# Altium PCB PCB_Rev1.1.PcbDoc (part 1 of 4)
Units mm, origin at the board's own origin, x right, y up, seen from the top; angles counter-clockwise.
Board outline 81.62 x 96.13 mm, 4 copper layers (Top Layer, GND, PWR, Bottom Layer), stack 1.49 mm thick; 185 components, 276 nets, 1052 pads, 353 vias.
Unrouted connection lines stored in the file: 133.
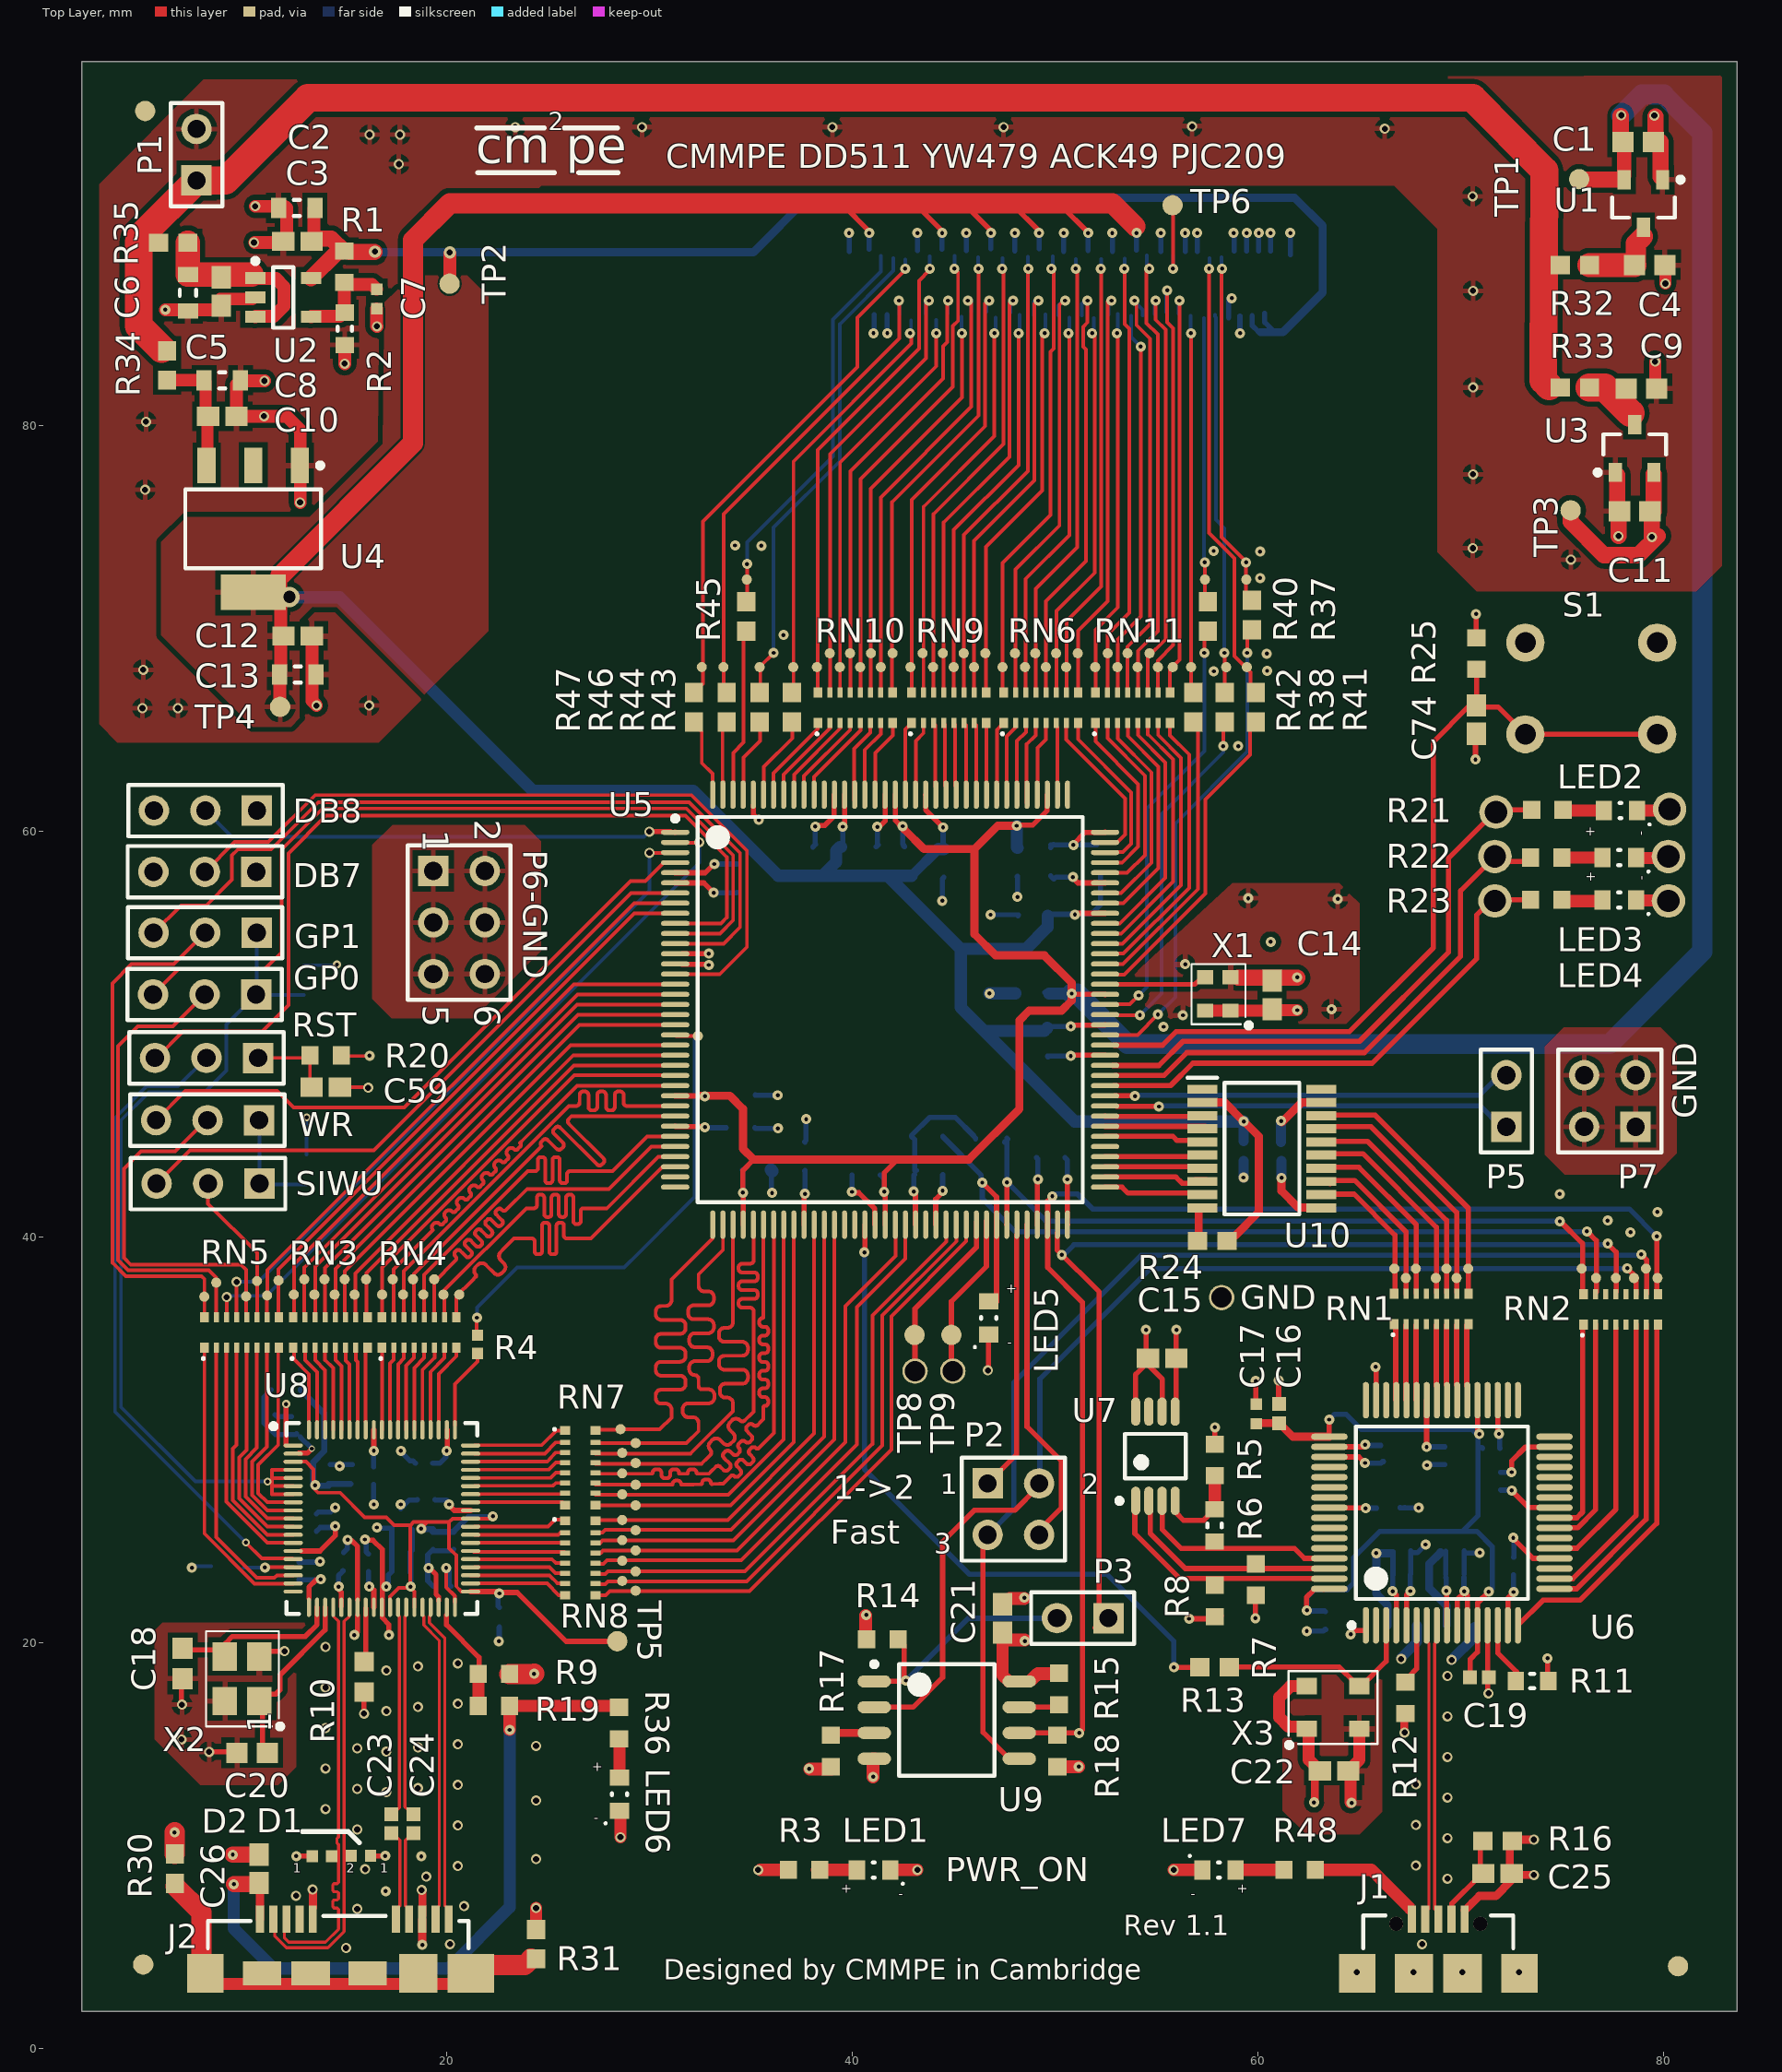
[diagram p0: Top Layer view]
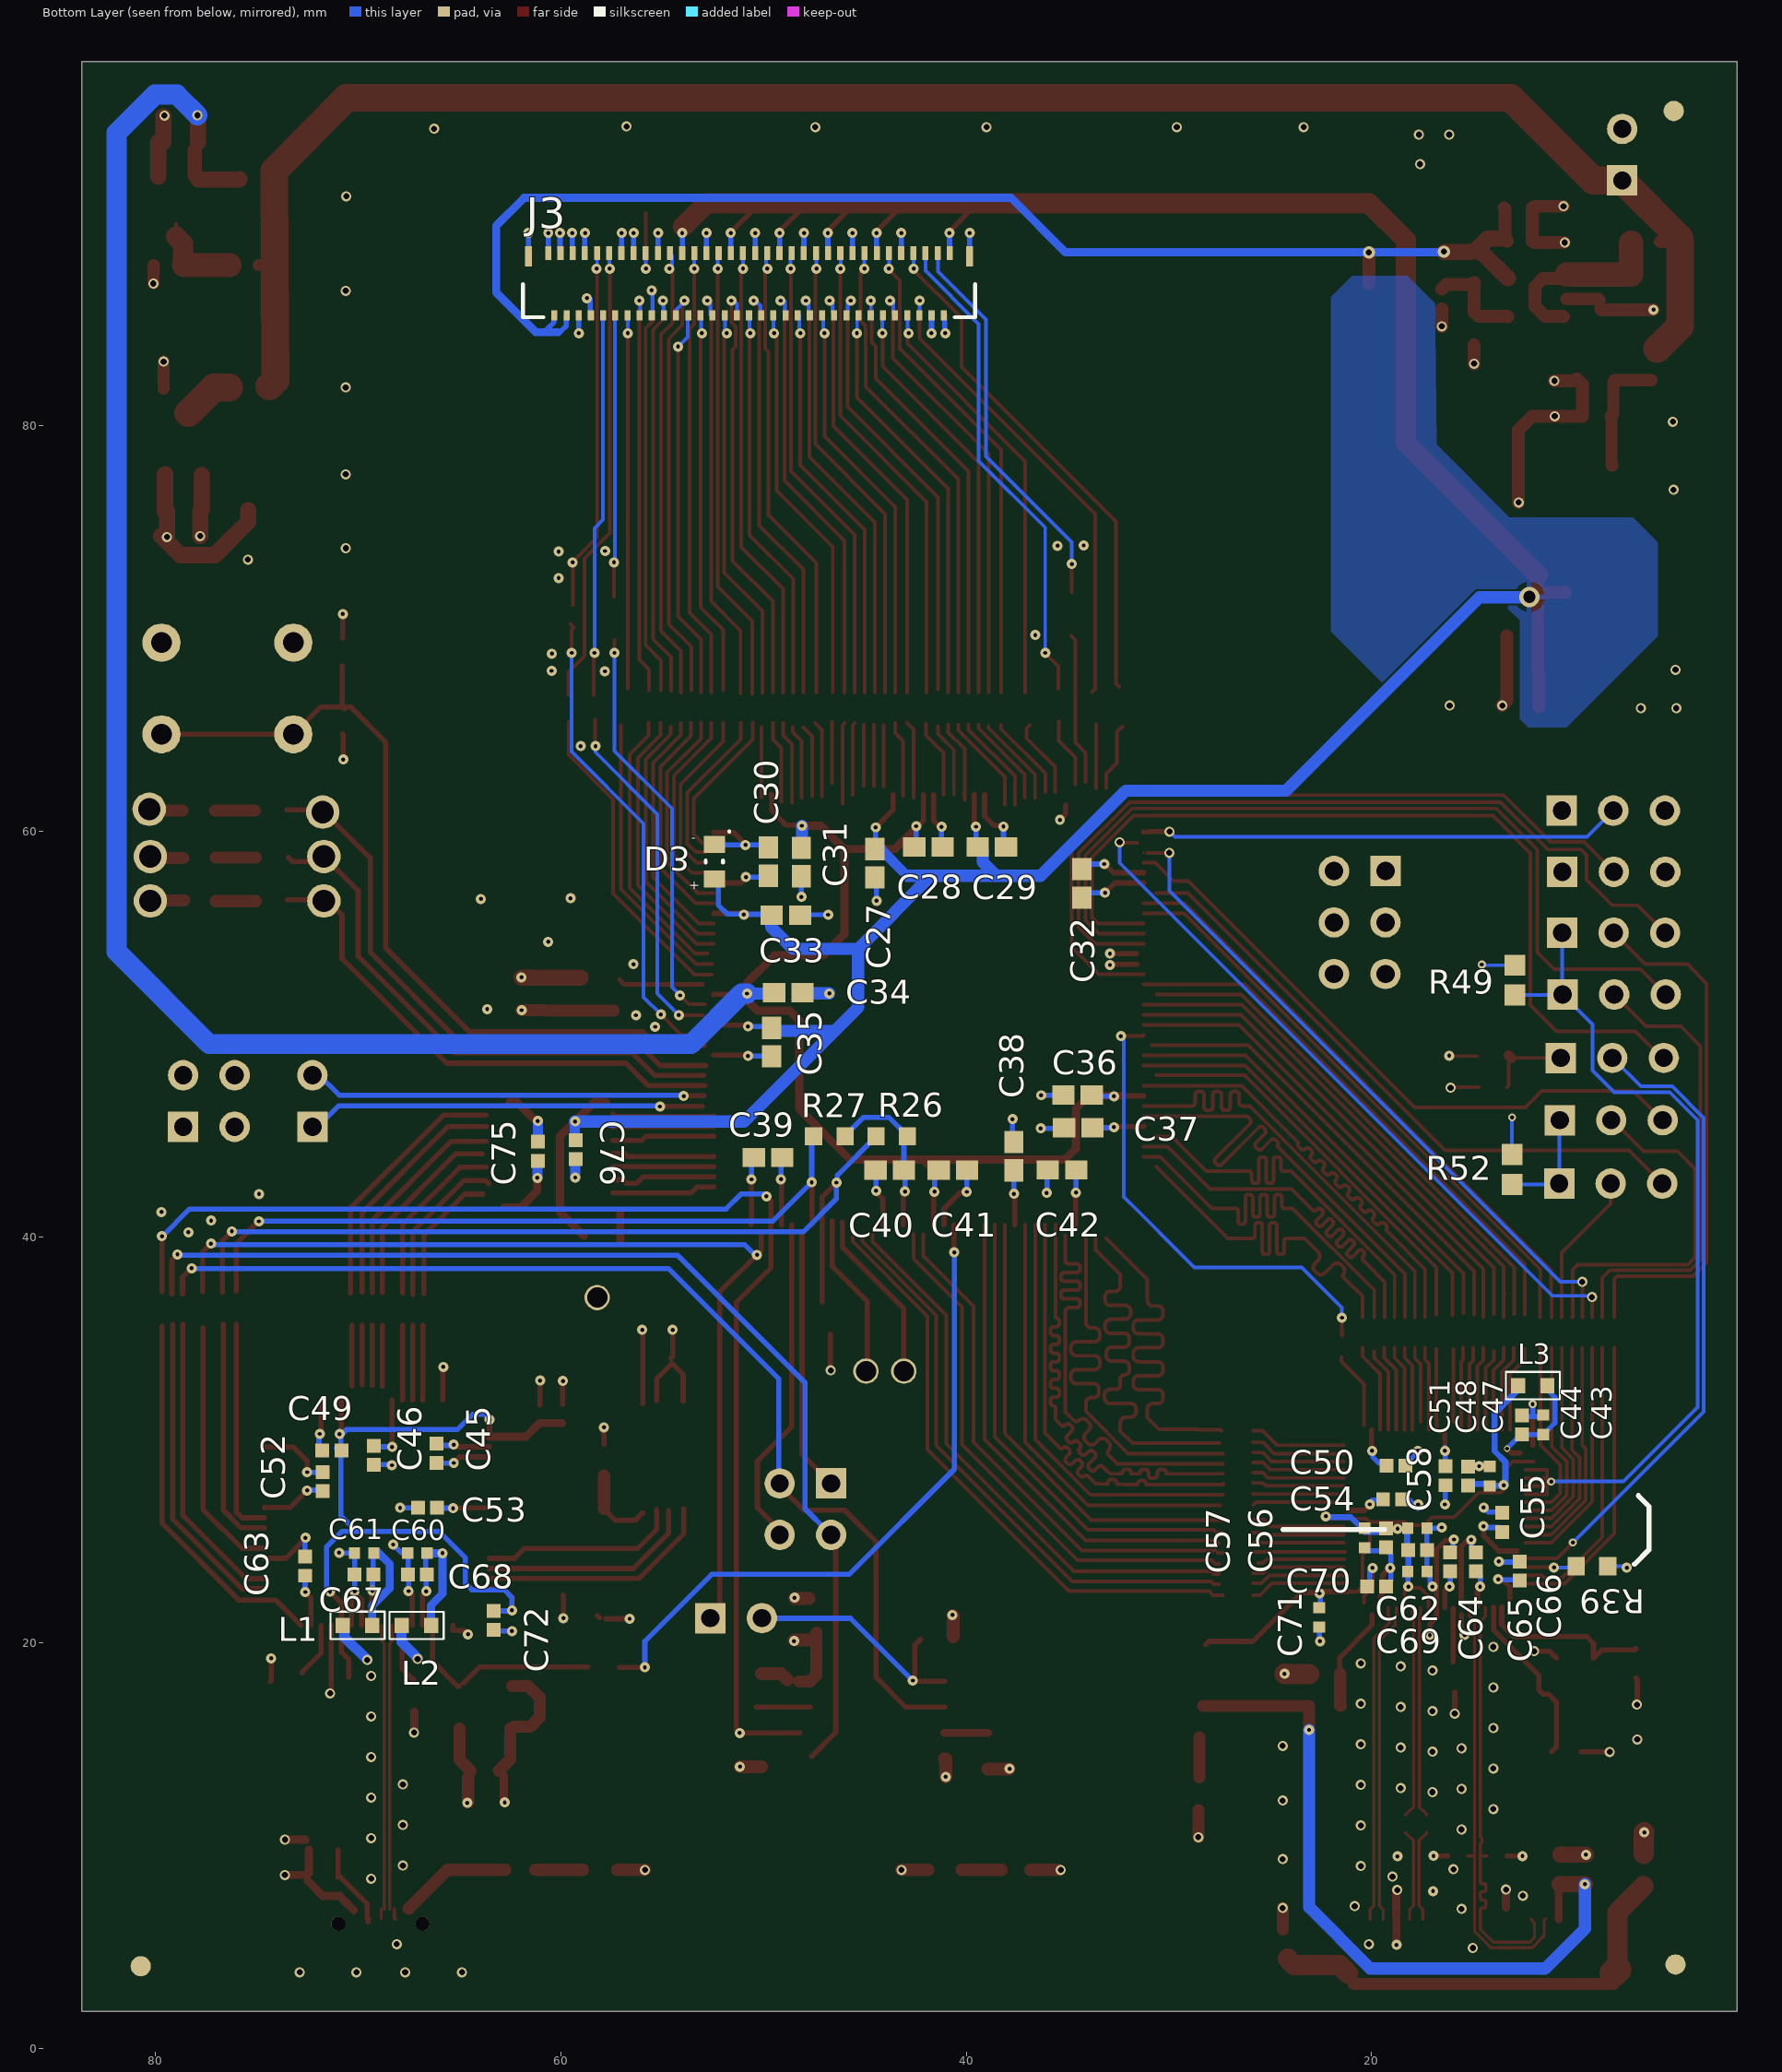
[diagram p1: Bottom Layer view, seen from below]
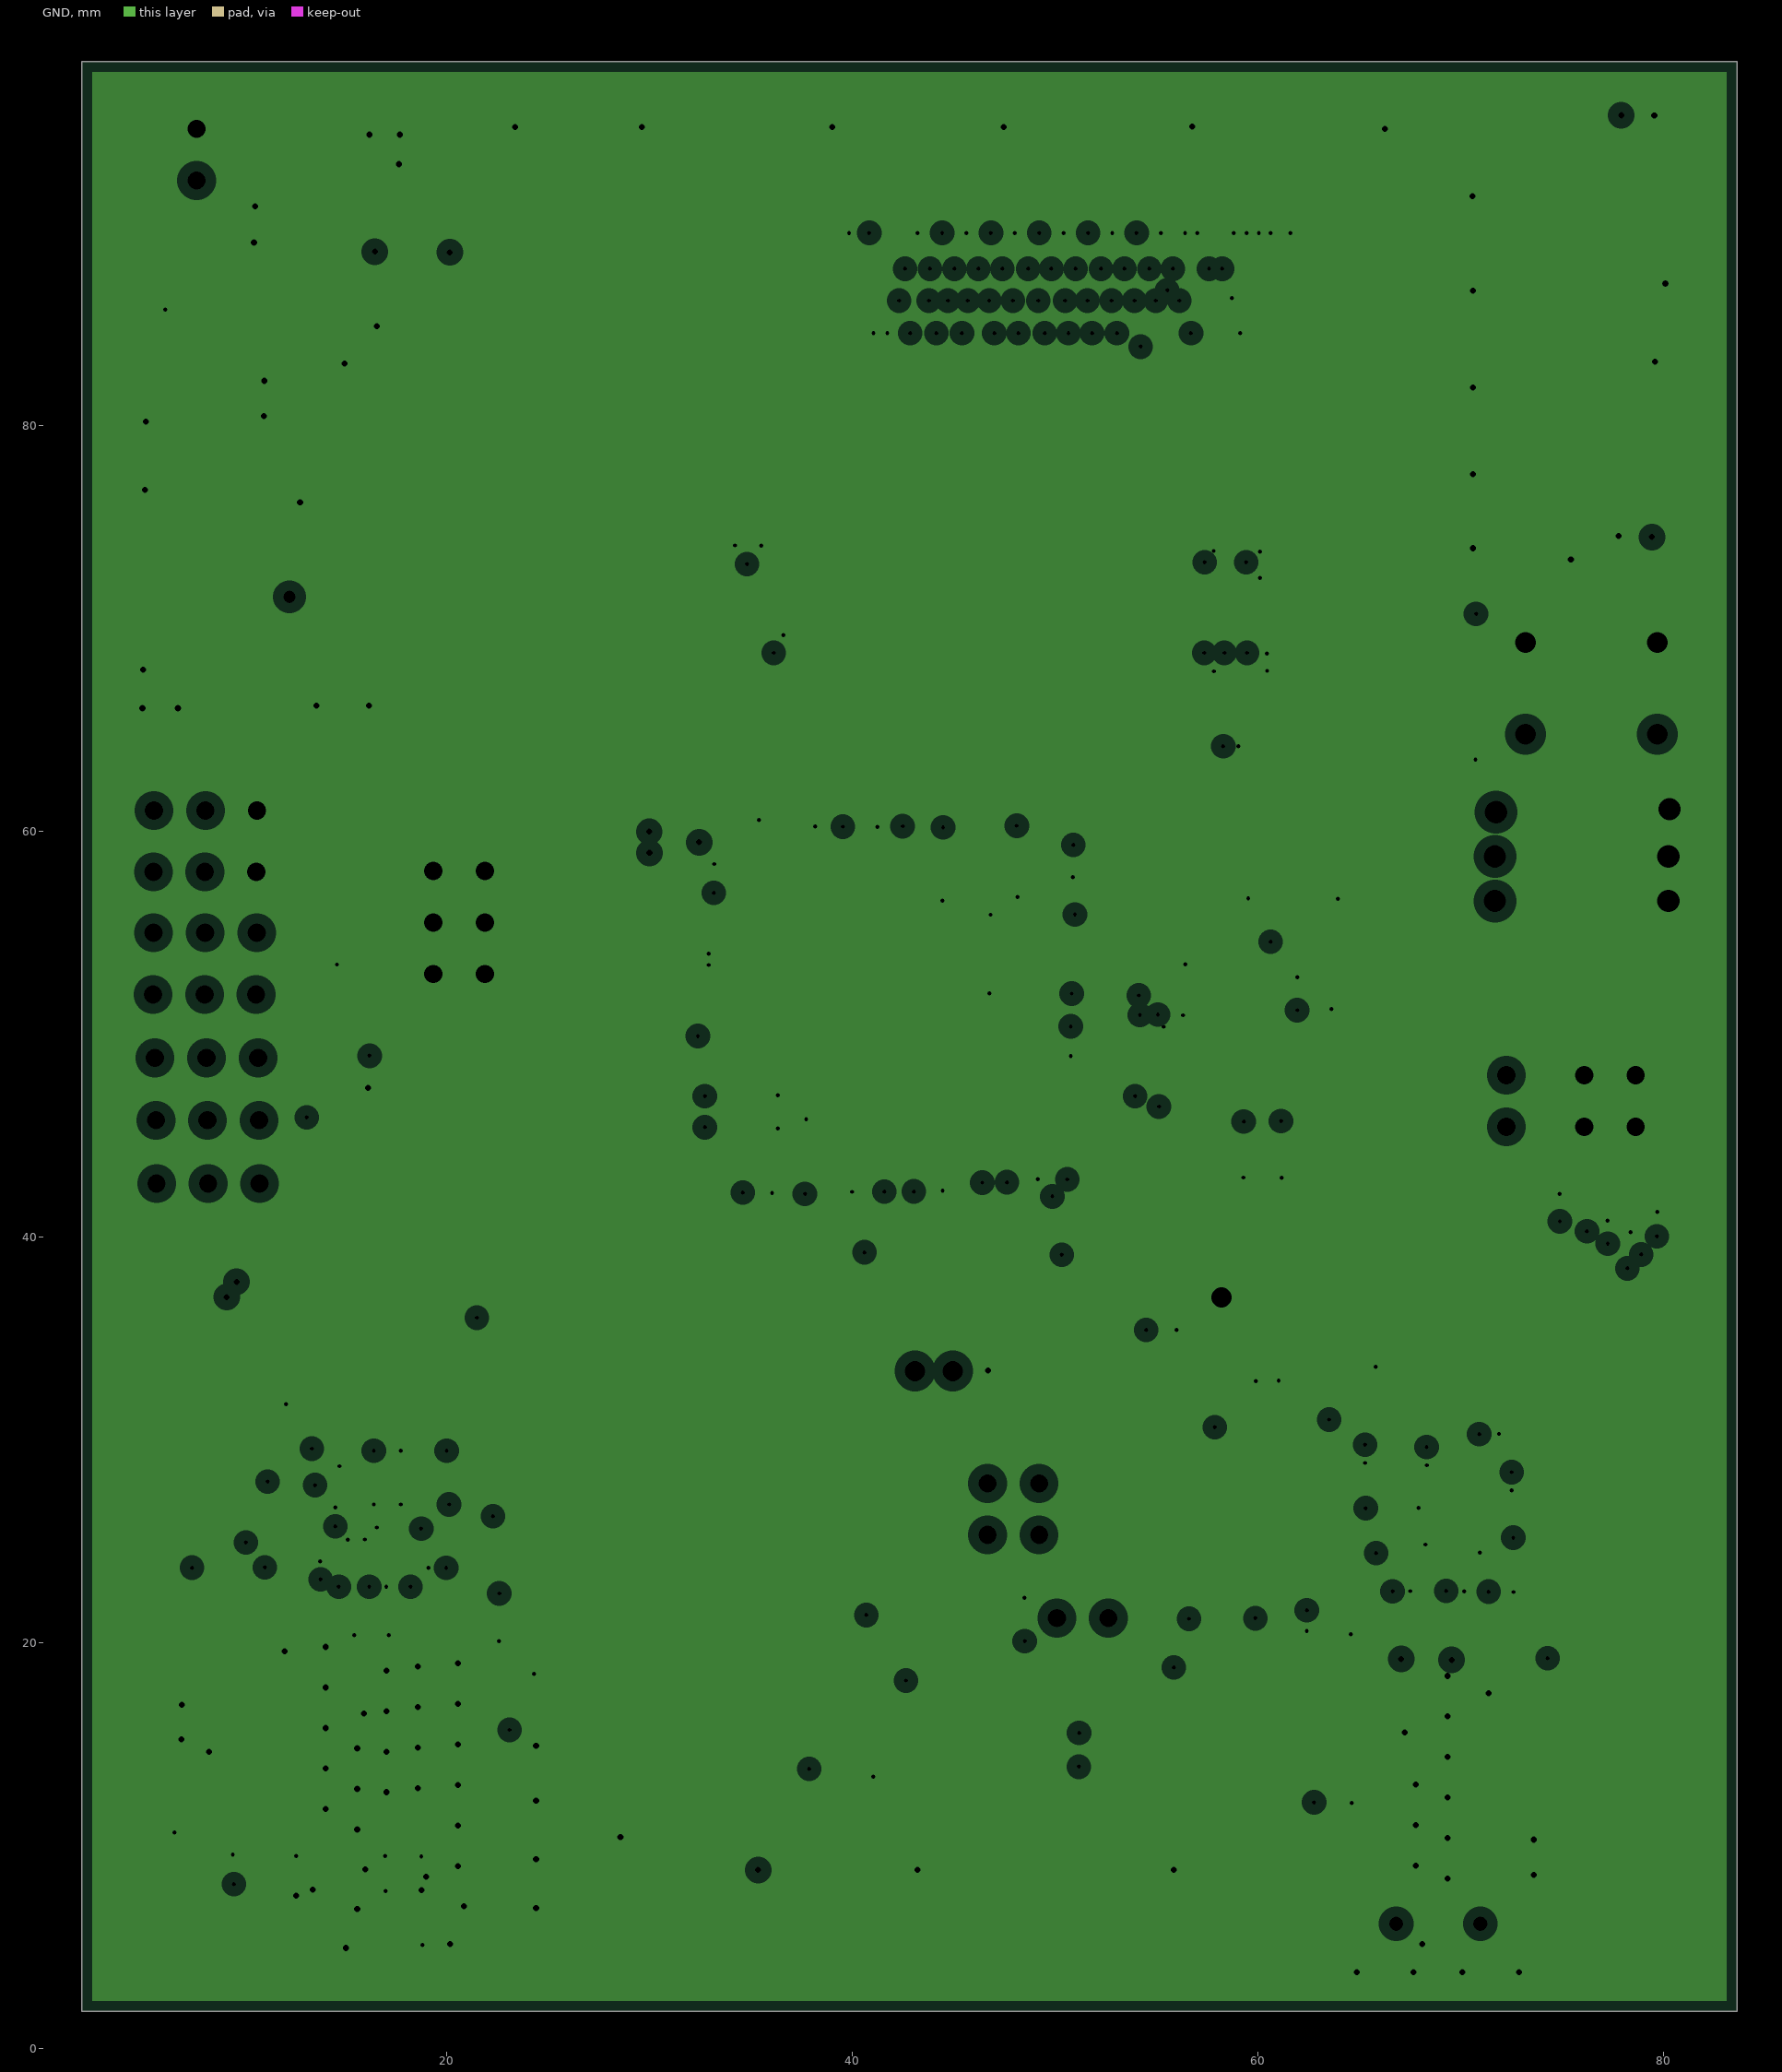
[diagram p2: GND, clearances drawn from the general rule]
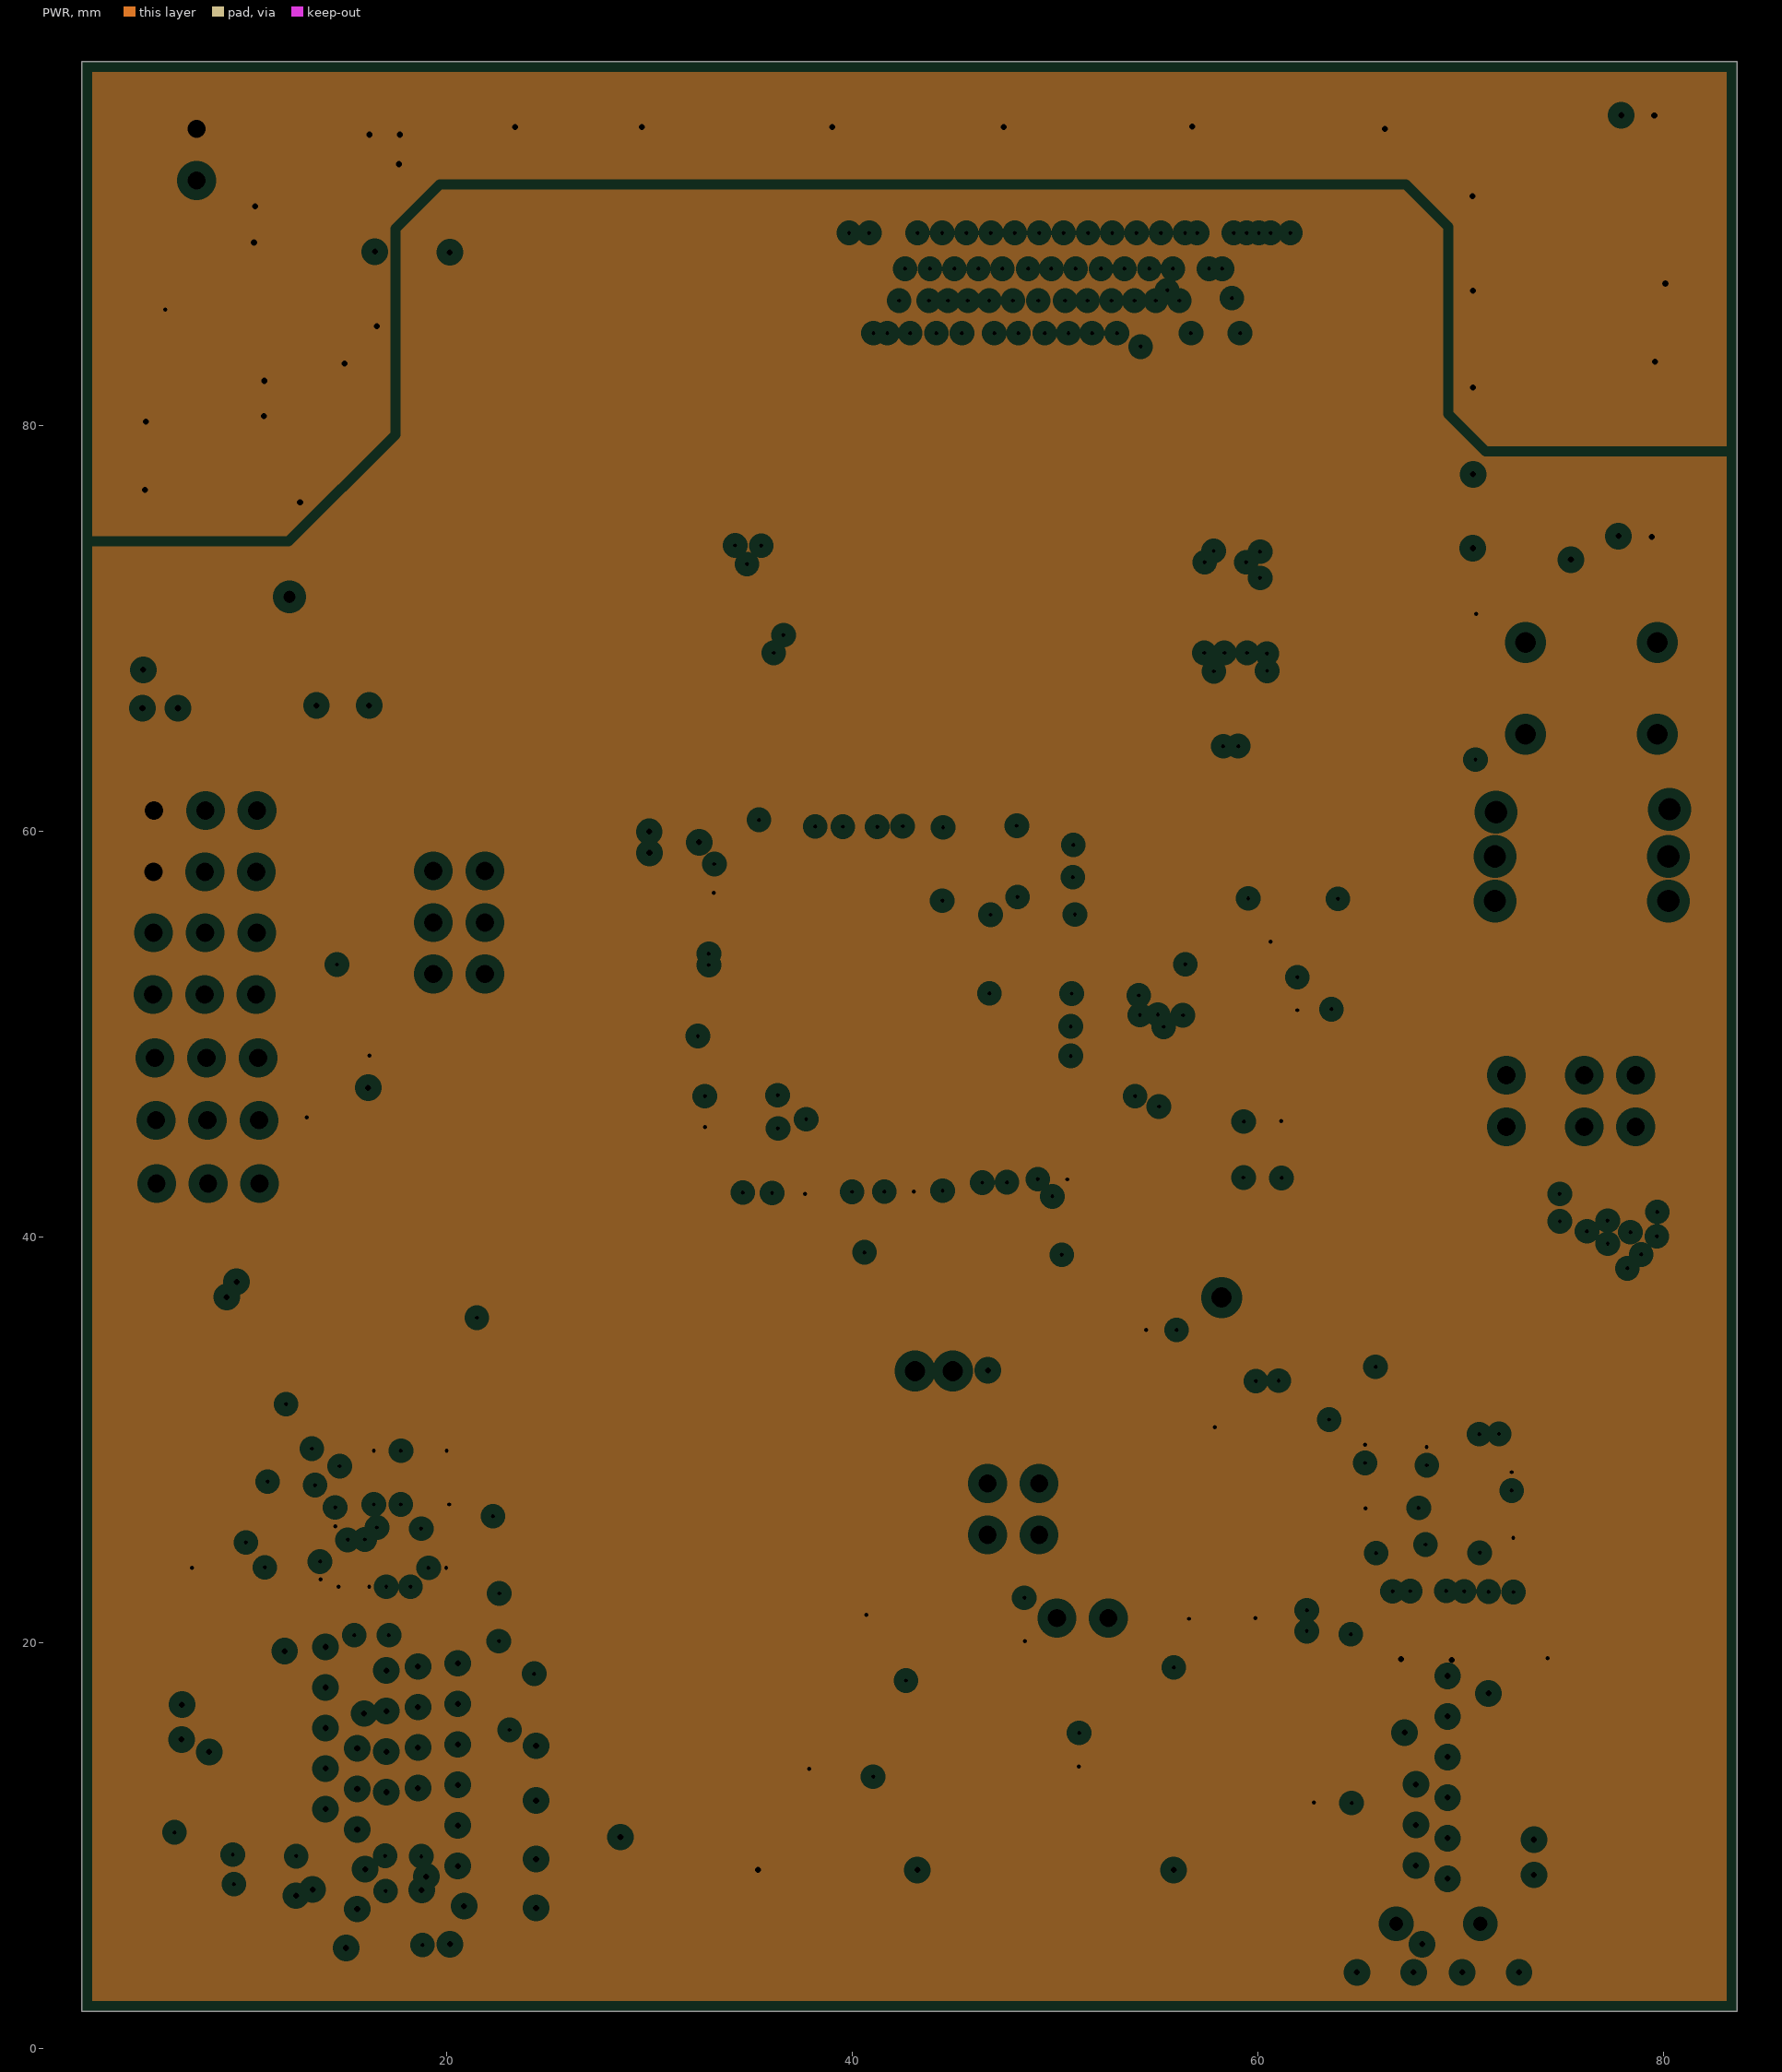
[diagram p3: PWR, clearances drawn from the general rule]

## Layer stack, top to bottom
Top Solder: solder mask 0.0102, Solder Resist, Dk 3.5
Top Layer: signal copper 0.035
Dielectric 1-2: prepreg 0.11, PP-015, Dk 4.29
GND: plane copper 0.035, net GND
Dielectric 2-3: dielectric 1.13, FR-4, Dk 3.96
PWR: plane copper 0.035, net (Multiple Nets)
Dielectric 3-4: prepreg 0.11, PP-015, Dk 4.29
Bottom Layer: signal copper 0.035
Bottom Solder: solder mask 0.0102, Solder Resist, Dk 3.5

## Board outline
1.994,1.817 83.612,1.817 83.612,97.944 1.994,97.944

## Design rules (kind name [scope] priority, off if disabled: settings)
Clearance PolygonAll [InNamedPolygon('Top Layer-GND') Or  InNamedPolygon('Top Layer-GND 4') Or  InNamedPolygon('Top Layer-GND 3') Or  InNamedPolygon('Top Layer-GND 2')] p1: gap=0.254 ignorepadtopadclearanceinfootprint=FALSE
Clearance [All] p2: gap=0.102 ignorepadtopadclearanceinfootprint=TRUE
ComponentClearance [All] p1: gap=0.025 collisioncheckmode=3 verticalgap=0.254 showdistances=FALSE
DiffPairsRouting DiffPair_Diff90DiffPairsRouting [InDifferentialPairClass('Diff90')] p1: maxlimit=0.127 minlimit=0.127 mostfreqgap=0.127 toplayer_minwidth=0.15 toplayer_maxwidth=0.15 toplayer_prefwidth=0.15 bottomlayer_minwidth=0.15 bottomlayer_maxwidth=0.15 bottomlayer_prefwidth=0.15 maxuncoupledlength=12.7
HoleSize [All] p1: absolutevalues=TRUE maxlimit=2.54 minlimit=0.2 maxpercent=80.000 minpercent=20.000
HoleToHoleClearance [All] p1: gap=0.1 allowstackedmicrovias=TRUE
MatchedLengths "Schematic Matched Net Lengths_1" [InNetClass('FT601FIFO')] p1: tolerance=24.5 checknetsindiffpair=FALSE checkdiffpairvsdiffpair=TRUE checkxsignals=TRUE checkothers=TRUE
MatchedLengths "Schematic Matched Net Lengths_42" [InNet('DATA16')] p2: tolerance=5 checknetsindiffpair=FALSE checkdiffpairvsdiffpair=TRUE checkxsignals=TRUE checkothers=TRUE
MatchedLengths "Schematic Matched Net Lengths_41" [InNet('DATA10')] p3: tolerance=5 checknetsindiffpair=FALSE checkdiffpairvsdiffpair=TRUE checkxsignals=TRUE checkothers=TRUE
MatchedLengths "Schematic Matched Net Lengths_40" [InNet('DATA11')] p4: tolerance=5 checknetsindiffpair=FALSE checkdiffpairvsdiffpair=TRUE checkxsignals=TRUE checkothers=TRUE
MatchedLengths "Schematic Matched Net Lengths_39" [InNet('DATA12')] p5: tolerance=5 checknetsindiffpair=FALSE checkdiffpairvsdiffpair=TRUE checkxsignals=TRUE checkothers=TRUE
MatchedLengths "Schematic Matched Net Lengths_38" [InNet('DATA13')] p6: tolerance=5 checknetsindiffpair=FALSE checkdiffpairvsdiffpair=TRUE checkxsignals=TRUE checkothers=TRUE
MatchedLengths "Schematic Matched Net Lengths_37" [InNet('DATA14')] p7: tolerance=5 checknetsindiffpair=FALSE checkdiffpairvsdiffpair=TRUE checkxsignals=TRUE checkothers=TRUE
MatchedLengths "Schematic Matched Net Lengths_36" [InNet('DATA15')] p8: tolerance=5 checknetsindiffpair=FALSE checkdiffpairvsdiffpair=TRUE checkxsignals=TRUE checkothers=TRUE
MatchedLengths "Schematic Matched Net Lengths_35" [InNet('DATA9')] p9: tolerance=5 checknetsindiffpair=FALSE checkdiffpairvsdiffpair=TRUE checkxsignals=TRUE checkothers=TRUE
MatchedLengths "Schematic Matched Net Lengths_24" [InNet('DATA31')] p10: tolerance=5 checknetsindiffpair=FALSE checkdiffpairvsdiffpair=TRUE checkxsignals=TRUE checkothers=TRUE
MatchedLengths "Schematic Matched Net Lengths_22" [InNet('DATA26')] p11: tolerance=5 checknetsindiffpair=FALSE checkdiffpairvsdiffpair=TRUE checkxsignals=TRUE checkothers=TRUE
MatchedLengths "Schematic Matched Net Lengths_21" [InNet('DATA17')] p12: tolerance=5 checknetsindiffpair=FALSE checkdiffpairvsdiffpair=TRUE checkxsignals=TRUE checkothers=TRUE
MatchedLengths "Schematic Matched Net Lengths_20" [InNet('SDAT')] p13: tolerance=5 checknetsindiffpair=FALSE checkdiffpairvsdiffpair=TRUE checkxsignals=TRUE checkothers=TRUE
MatchedLengths "Schematic Matched Net Lengths_19" [InNet('DATA25')] p14: tolerance=5 checknetsindiffpair=FALSE checkdiffpairvsdiffpair=TRUE checkxsignals=TRUE checkothers=TRUE
MatchedLengths DiffPair_Diff90MatchedLengths [InDifferentialPairClass('Diff90')] p15: tolerance=0.127 checknetsindiffpair=TRUE checkdiffpairvsdiffpair=FALSE checkxsignals=FALSE checkothers=FALSE
MatchedLengths DiffPair_MatchedLengths [All] p16: tolerance=1 checknetsindiffpair=TRUE checkdiffpairvsdiffpair=FALSE checkxsignals=FALSE checkothers=FALSE
MatchedLengths DiffPair_MatchedLengths_1 [InDifferentialPair ('USB_D')] p17: tolerance=1 checknetsindiffpair=TRUE checkdiffpairvsdiffpair=FALSE checkxsignals=FALSE checkothers=FALSE
MinimumSolderMaskSliver [All] p1: minsoldermaskwidth=0.1
PlaneClearance [All] p1: clearance=0.508
PlaneConnect [All] p1: planeconnectstyle=Relief reliefexpansion=0.508 reliefentries=4 reliefconductorwidth=0.254 reliefairgap=0.254
PolygonConnect [All] p1: connectstyle=Relief reliefconductorwidth=0.254 reliefentries=4 polygonreliefangle="90 Angle" airgapwidth=0.254
RoomDefinition FPGA_Power_SPI [InComponentClass('FPGA_Power_SPI')] p1: confinementstyle=ConfineIn formatcopy=TRUE lockcomponents=FALSE outline 0,0 50.8,0 50.8,25.4 0,25.4
RoomDefinition USB_SPI [InComponentClass('USB_SPI')] p2: confinementstyle=ConfineIn formatcopy=TRUE lockcomponents=FALSE outline 0,0 50.8,0 50.8,25.4 0,25.4
RoomDefinition FT601 [InComponentClass('FT601')] p3: confinementstyle=ConfineIn formatcopy=TRUE lockcomponents=FALSE outline 0,0 50.8,0 50.8,25.4 0,25.4
RoomDefinition FPGA_SLM [InComponentClass('FPGA_SLM')] p4: confinementstyle=ConfineIn formatcopy=TRUE lockcomponents=FALSE outline 0,0 50.8,0 50.8,25.4 0,25.4
RoutingVias [All] p1: holewidth=0.711 width=1.27 viastyle="Through Hole" minholewidth=0.2 minwidth=0.3 maxholewidth=0.711 maxwidth=1.27
SilkToSilkClearance [All] p1: silktosilkclearance=0.1
SilkToSolderMaskClearance [IsPad] p1: minsilkscreentomaskgap=0.1 clearancetoexposedcopper=TRUE
SolderMaskExpansion [All] p1: expansion=0.102
UnRoutedNet [All] p1: checkbadconnections=TRUE
Width [All] p1: maxlimit=1.37 minlimit=0.014 preferedwidth=0.254
20 further rules are at their usual default settings.

## Classes and differential pairs
net class FT601FIFO: FIFO_CLK FIFO_D0 FIFO_D1 FIFO_D2 FIFO_D3 FIFO_D4 FIFO_D5 FIFO_D6 FIFO_D7 FIFO_D8 FIFO_D9 FIFO_D10 FIFO_D11 FIFO_D12 FIFO_D13 FIFO_D14 FIFO_D15 FIFO_D16 FIFO_D17 FIFO_D18 FIFO_D19 FIFO_D20 FIFO_D21 FIFO_D22 FIFO_D23 FIFO_D24 FIFO_D25 FIFO_D26 FIFO_D27 FIFO_D28 FIFO_D29 FIFO_D30 FIFO_D31 FT_OE FT_RD FT_RXF FT_SIWU FT_TXE FT_WR
net class SLM: DATA0 DATA1 DATA2 DATA3 DATA4 DATA5 DATA6 DATA7 DATA8 DATA9 DATA10 DATA11 DATA12 DATA13 DATA14 DATA15 DATA16 DATA17 DATA18 DATA19 DATA20 DATA21 DATA22 DATA23 DATA24 DATA25 DATA26 DATA27 DATA28 DATA29 DATA30 DATA31 INVERT NetJ3_17 R\E\S\E\T\ SCK SDAT SEN SLM_CLK SOUT SYNC UPDATE VALID
differential pair class Diff90: D ROD TD TD1 USB_D
component class USB_SPI: C15 C16 C17 C19 C22 C25 C45 C46 C49 C52 C53 C60 C61 C63 C67 C68 C72 C75 C76 J1 L1 L2 LED7 R5 R6 R7 R8 R11 R12 R13 R16 R24 R48 RN1 RN2 U6 U7 U10 X3
component class FT601: * *1 C18 C20 C23 C24 C26 C43 C44 C47 C48 C50 C51 C54 C55 C56 C57 C58 C59 C62 C64 C65 C66 C69 C70 C71 D1 D2 DB7 DB8 GP0 GP1 J2 L3 LED6 R4 R9 R10 R19 R20 R30 R31 R36 R39 R49 R52 RN3 RN4 RN5 RN7 RN8 RST SIWU TP5 U8 WR X2
component class FPGA_SLM: C14 C74 J3 P5 R25 R37 R38 R40 R41 R42 R43 R44 R45 R46 R47 RN6 RN9 RN10 RN11 S1 tp6 tp7 U5 X1
component class FPGA_Power_SPI: C1 C2 C3 C4 C5 C6 C7 C8 C9 C10 C11 C12 C13 C21 C27 C28 C29 C30 C31 C32 C33 C34 C35 C36 C37 C38 C39 C40 C41 C42 D3 LED1 LED2 LED3 LED4 LED5 P1 P2 P3 P6-GND P7 R1 R2 R3 R14 R15 R17 R18 R21 R22 R23 R26 R27 R32 R33 R34 R35 TP1 TP2 TP3 TP4 TP8 TP9 U1 U2 U3 U4 U9
differential pair D: +D_P -D_N
differential pair TD1: +TD1_P -TD1_N
differential pair USB_D: +USB_D_P -USB_D_N
differential pair TD: +TD_P -TD_N
differential pair ROD: +ROD_P -ROD_N

## Components (designator, comment, footprint, x,y, rotation, side; value= is the part's Value field where it differs from the comment)
C1 "C0603C475K9PAC7411" Cap_4.7uF 78.738,93.98 r0 top value=4.7uF
C2 "C1608X5R0J106K080AE" Cap_10uF 12.586,90.736 r0 top value=10uF
C3 "AC0603KRX7R9BB104" Cap_0.1uF 12.623,89.085 r0 top value=0.1uF
C4 "C0603C475K9PAC7411" Cap_4.7uF 79.321,87.92 r0 top value=4.7uF
C5 "AC0603KRX7R9BB104" Cap_0.1uF 8.868,86.61 r90 top value=0.1uF
C6 "C1608X5R0J106K080AE" Cap_10uF 7.218,86.549 r90 top value=10uF
C7 "C0402S471K3RACAUTO" CAP_470pF 16.536,86.242 r90 top value=470pF
C8 "C1608X5R0J106K080AE" Cap_10uF 8.917,82.236 r180 top value=10uF
C9 "C0603C475K9PAC7411" Cap_4.7uF 78.904,81.827 r0 top value=4.7uF
C10 "AC0603KRX7R9BB104" Cap_0.1uF 8.917,80.458 r180 top value=0.1uF
C11 "C0603C475K9PAC7411" Cap_4.7uF 78.578,75.784 r180 top value=4.7uF
C12 "AC0603KRX7R9BB104" Cap_0.1uF 12.635,69.625 r180 top value=0.1uF
C13 "C1608X5R0J106K080AE" Cap_10uF 12.646,67.72 r180 top value=10uF
C14 "AC0603KRX7R9BB104" Cap_0.1uF 60.695,51.928 r270 top value=0.1uF
C15 "AC0603KRX7R9BB104" Cap_0.1uF 55.27,34.014 r180 top value=0.1uF
C16 "CC0402KPX5R6BB104" CAP_0.1UF_0402 61.036,31.282 r270 top value="0.1 uF"
C17 "C1005X5R0J475K050BC" CAP_4.7uF_0402 59.908,31.267 r270 top value=4.7uF
C18 "C0603C180K5RACAUTO" CAP_18pF_0603 6.963,18.97 r90 top value="18 pF"
C19 "CC0402KPX5R6BB104" CAP_0.1UF_0402 70.92,18.285 r180 top value="0.1 uF"
C20 "C0603C180K5RACAUTO" CAP_18pF_0603 10.394,14.564 r0 top value="18 pF"
C21 "AC0603KRX7R9BB104" Cap_0.1uF 47.397,21.181 r270 top value=0.1uF
C22 "AC0603KRX7R9BB104" Cap_0.1uF 63.748,13.67 r180 top value=0.1uF
C23 "CC0402KPX5R6BB104" CAP_0.1UF_0402 17.26,11.057 r90 top value="0.1 uF"
C24 "CC0402KPX5R6BB104" CAP_0.1UF_0402 18.35,11.057 r90 top value="0.1 uF"
C25 "AC0603KRX7R9BB104" Cap_0.1uF 71.811,8.606 r0 top value=0.1uF
C26 "AC0603KRX7R9BB104" Cap_0.1uF 10.736,8.836 r270 top value=0.1uF
C27 "AC0603KRX7R9BB104" Cap_0.1uF 44.506,58.426 r270 bottom value=0.1uF
C28 "AC0603KRX7R9BB104" Cap_0.1uF 41.86,59.229 r180 bottom value=0.1uF
C29 "AC0603KRX7R9BB104" Cap_0.1uF 38.741,59.222 r180 bottom value=0.1uF
C30 "AC0603KRX7R9BB104" Cap_0.1uF 49.765,58.499 r270 bottom value=0.1uF
C31 "AC0603KRX7R9BB104" Cap_0.1uF 48.133,58.483 r270 bottom value=0.1uF
C32 "AC0603KRX7R9BB104" Cap_0.1uF 34.293,57.43 r90 bottom value=0.1uF
C33 "AC0603KRX7R9BB104" Cap_0.1uF 48.891,55.863 r180 bottom value=0.1uF
C34 "AC0603KRX7R9BB104" Cap_0.1uF 48.777,52.047 r180 bottom value=0.1uF
C35 "AC0603KRX7R9BB104" Cap_0.1uF 49.606,49.603 r270 bottom value=0.1uF
C36 "AC0603KRX7R9BB104" Cap_0.1uF 34.505,46.991 r0 bottom value=0.1uF
C37 "AC0603KRX7R9BB104" Cap_0.1uF 34.475,45.38 r0 bottom value=0.1uF
C38 "AC0603KRX7R9BB104" Cap_0.1uF 37.649,43.974 r90 bottom value=0.1uF
C39 "AC0603KRX7R9BB104" Cap_0.1uF 49.77,43.911 r180 bottom value=0.1uF
C40 "AC0603KRX7R9BB104" Cap_0.1uF 43.772,43.283 r0 bottom value=0.1uF
C41 "AC0603KRX7R9BB104" Cap_0.1uF 40.658,43.283 r180 bottom value=0.1uF
C42 "AC0603KRX7R9BB104" Cap_0.1uF 35.274,43.3 r0 bottom value=0.1uF
C43 "C1005X5R0J475K050BC" CAP_4.7uF_0402 11.539,30.733 r90 bottom value=4.7uF
C44 "CC0402KPX5R6BB104" CAP_0.1UF_0402 12.588,30.731 r90 bottom value="0.1 uF"
C45 "CC0402KPX5R6BB104" CAP_0.1UF_0402 66.133,29.328 r90 bottom value="0.1 uF"
C46 "CC0402KPX5R6BB104" CAP_0.1UF_0402 69.21,29.227 r90 bottom value="0.1 uF"
C47 "C0402C682K5RECAUTO" CAP_6700pF_0402 14.176,28.197 r90 bottom value="6800 pF"
C48 "CC0402KPX5R6BB104" CAP_0.1UF_0402 15.245,28.205 r90 bottom value="0.1 uF"
C49 "CC0402KPX5R6BB104" CAP_0.1UF_0402 71.284,29.465 r180 bottom value="0.1 uF"
C50 "CC0402KPX5R6BB104" CAP_0.1UF_0402 18.81,28.716 r180 bottom value="0.1 uF"
C51 "CC0402KPX5R6BB104" CAP_0.1UF_0402 16.369,28.22 r270 bottom value="0.1 uF"
C52 "CC0402KPX5R6BB104" CAP_0.1UF_0402 71.742,27.928 r90 bottom value="0.1 uF"
C53 "CC0402KPX5R6BB104" CAP_0.1UF_0402 66.566,26.65 r180 bottom value="0.1 uF"
C54 "CC0402KPX5R6BB104" CAP_0.1UF_0402 18.971,27.046 r180 bottom value="0.1 uF"
C55 "CC0402KPX5R6BB104" CAP_0.1UF_0402 13.563,25.918 r90 bottom value="0.1 uF"
C56 "CC0402KPX5R6BB104" CAP_0.1UF_0402 19.3,25.153 r270 bottom value="0.1 uF"
C57 "C0402C682K5RECAUTO" CAP_6700pF_0402 20.355,25.149 r270 bottom value="6800 pF"
C58 "C1005X5R0J475K050BC" CAP_4.7uF_0402 17.748,25.634 r180 bottom value=4.7uF
C59 "AC0603KRX7R9BB104" Cap_0.1uF 14.021,47.379 r180 top value=0.1uF
C60 "C1005X5R0J475K050BC" CAP_4.7uF_0402 67.068,24.413 r180 bottom value=4.7uF
C61 "C1005X5R0J475K050BC" CAP_4.7uF_0402 69.693,24.409 r180 bottom value=4.7uF
C62 "CC0402KPX5R6BB104" CAP_0.1UF_0402 17.739,24.552 r180 bottom value="0.1 uF"
C63 "CC0402KPX5R6BB104" CAP_0.1UF_0402 72.6,23.764 r90 bottom value="0.1 uF"
C64 "CC0402KPX5R6BB104" CAP_0.1UF_0402 16.126,23.977 r90 bottom value="0.1 uF"
C65 "CC0402KPX5R6BB104" CAP_0.1UF_0402 14.868,23.977 r90 bottom value="0.1 uF"
C66 "CC0402KPX5R6BB104" CAP_0.1UF_0402 12.694,23.519 r90 bottom value="0.1 uF"
C67 "CC0402KPX5R6BB104" CAP_0.1UF_0402 69.702,23.348 r180 bottom value="0.1 uF"
C68 "CC0402KPX5R6BB104" CAP_0.1UF_0402 67.07,23.35 r180 bottom value="0.1 uF"
C69 "C0402C682K5RECAUTO" CAP_6700pF_0402 17.747,23.494 r180 bottom value="6800 pF"
C70 "CC0402KPX5R6BB104" CAP_0.1UF_0402 19.76,22.762 r180 bottom value="0.1 uF"
C71 "C1005X5R0J475K050BC" CAP_4.7uF_0402 22.592,21.238 r270 bottom value=4.7uF
C72 "CC0402KPX5R6BB104" CAP_0.1UF_0402 63.315,21.092 r90 bottom value="0.1 uF"
C74 "AC0603KRX7R9BB104" Cap_0.1uF 70.759,65.506 r90 top value=0.1uF
C75 "CC0402KPX5R6BB104" Cap_0.1uF_0402 61.116,44.221 r90 bottom value="0.1 uF"
C76 "CC0402KPX5R6BB104" Cap_0.1uF_0402 59.265,44.305 r90 bottom value="0.1 uF"
D1 "PGB1010402KR" ESD_Suppressor 15.752,9.478 r180 top
D2 "PGB1010402KR" ESD_Suppressor 13.831,9.461 r0 top
D3 "CDBU0520" SchottkyDiode_CDBU0520 52.424,58.499 r90 bottom
DB7 "Header 3" HDR1X3 10.599,57.998 r180 top (schematic designator P12)
DB8 "Header 3" HDR1X3 10.625,61.019 r180 top (schematic designator P13)
GP0 "Header 3" HDR1X3 10.583,51.949 r180 top (schematic designator P4)
GP1 "Header 3" HDR1X3 10.609,54.996 r180 top (schematic designator P8)
J1 "629105136821" 629105136821 68.888,3.682 r0 top
J2 "692622030100" 692622030100 14.951,3.729 r0 top locked
J3 "FH39A-67S-0.3SHW(10)" Hirose_connector 50.71,86.97 r0 bottom locked
L1 "742863160" FerriteBeads 70.75,20.837 r180 bottom
L2 "742863160" FerriteBeads 67.845,20.832 r180 bottom
L3 "BLM18PG300SZ1D" FerriteBeads 12.787,32.665 r180 bottom value=30R@100MHz/1A
LED1 "TLMS1000-GS08" LED_RED 41.041,8.787 r0 top
LED2 "TLMS1000-GS08" LED_RED 77.871,61.023 r0 top
LED3 "TLMS1000-GS08" LED_RED 77.817,58.7 r0 top
LED4 "TLMS1000-GS08" LED_RED 77.817,56.607 r0 top
LED5 "TLMS1000-GS08" LED_RED 46.722,36 r270 top
LED6 "TLMS1000-GS08" LED_RED 28.507,12.519 r270 top
LED7 "TLMS1000-GS08" LED_RED 58.069,8.787 r180 top
P1 "Header 2" HDR1X2 7.646,92.087 r90 top
P2 "Header 4" HDR2X2 46.661,27.842 r270 top
P3 "Header 2" HDR1X2 52.618,21.202 r180 top
P5 "Header 2" HDR1X2 72.245,45.427 r90 top
P6-GND "Header 3X2" HDR2X3 19.323,58.041 r270 top (schematic designator P6)
P7 "Header 4" HDR2X2 78.621,45.427 r90 top
R1 "RT0603FRE13680RL" RES_680 14.936,87.833 r90 top value=680
R2 "CRCW06032K20JNEAC" RES_2.2K 14.952,84.773 r90 top value=2.2K
R3 "RT0603FRE13680RL" RES_680 37.612,8.787 r0 top value=680
R4 "ERJ2RKD33R0X" Res_33_0402 21.497,34.702 r90 top value=33
R5 "RT0603WRE0710KL" RES_10K 57.87,29.004 r90 top value=10K
R6 "CRCW06032K20JNEAC" RES_2.2K 57.858,25.769 r270 top value=2.2K
R7 "RT0603WRE0710KL" RES_10K 59.886,23.101 r270 top value=10K
R8 "RT0603WRE0710KL" RES_10K 57.871,22.049 r270 top value=10K
R9 "RT0603WRE0710KL" RES_10K 22.308,18.45 r180 top value=10K
R10 "ERJ-3RBD1601V" RES_1.6K 15.917,18.302 r90 top value=1.6K
R11 "CRCW06032K20JNEAC" RES_2.2K 73.512,18.093 r180 top value=2.2K
R12 "AC0603FR-1012KL" RES_12K 67.262,17.266 r90 top value=12K
R13 "CRCW06030000Z0EAC" RES_0 57.853,18.787 r180 top value=0
R14 "RT0603WRE0710KL" RES_10K 41.469,20.158 r180 top value=10K
R15 "RT0603WRE0710KL" RES_10K 50.181,17.708 r90 top value=10K
R16 "CRCW06030000Z0EAC" RES_0 71.811,10.207 r0 top value=0
R17 "RT0603WRE0710KL" RES_10K 38.932,14.65 r270 top value=10K
R18 "RT0603WRE0710KL" RES_10K 50.108,14.65 r270 top value=10K
R19 "AC0603JR-134K7L" RES_4.7K 22.311,16.877 r0 top value=4.7K
R20 "SR0603KR-07100KL" RES_100K 14.015,48.946 r180 top value=100K
R21 "RT0603FRE13680RL" RES_680 74.269,61.05 r0 top value=680
R22 "RT0603FRE13680RL" RES_680 74.215,58.7 r0 top value=680
R23 "RT0603FRE13680RL" RES_680 74.215,56.622 r0 top value=680
R24 "CRCW06030000Z0EAC" RES_0 57.74,39.801 r0 top value=0
R25 "RT0603WRE0710KL" RES_10K 70.761,68.756 r90 top value=10K
R26 "RT0603FRE13680RL" RES_680 43.679,44.959 r0 bottom value=680
R27 "RT0603WRE0710KL" RES_10K 46.753,44.957 r0 bottom value=10K
R30 "CRCW06030000Z0EAC" RES_0 6.579,8.845 r90 top value=0
R31 "CRCW06030000Z0EAC" RES_0 24.391,5.127 r90 top value=0
R32 "CRCW06030000Z0EAC" RES_0 75.622,87.912 r0 top value=0
R33 "CRCW06030000Z0EAC" RES_0 75.623,81.88 r0 top value=0
R34 "CRCW06030000Z0EAC" RES_0 6.193,82.965 r270 top value=0
R35 "CRCW06030000Z0EAC" RES_0 6.491,89.02 r180 top value=0
R36 "RT0603FRE13680RL" RES_680 28.482,16.028 r270 top value=680
R37 "CRCW06030000Z0EAC" RES_0 59.702,70.656 r90 top value=0
R38 "CRCW06030000Z0EAC" RES_0 58.349,66.116 r90 top value=0
R39 "RT0603WRE0710KL" RES_10K 9.138,23.758 r0 bottom value=10K
R40 "CRCW06030000Z0EAC" RES_0 57.522,70.594 r90 top value=0
R41 "CRCW06030000Z0EAC" RES_0 59.892,66.116 r90 top value=0
R42 "CRCW06030000Z0EAC" RES_0 56.808,66.116 r90 top value=0
R43 "CRCW06030000Z0EAC" RES_0 37.005,66.116 r90 top value=0
R44 "CRCW06030000Z0EAC" RES_0 35.412,66.116 r90 top value=0
R45 "CRCW06030000Z0EAC" RES_0 34.762,70.586 r90 top value=0
R46 "CRCW06030000Z0EAC" RES_0 33.796,66.116 r90 top value=0
R47 "CRCW06030000Z0EAC" RES_0 32.179,66.116 r90 top value=0
R48 "RT0603FRE13680RL" RES_680 62.053,8.787 r180 top value=680
R49 "SR0603KR-07100KL" RESC1607X60N 12.935,52.658 r270 bottom value=100K
R52 "SR0603KR-07100KL" RESC1607X60N 13.08,43.321 r270 bottom value=100K
RN1 "EXB-2HVR000V" RESARRAY_0 68.48,36.486 r90 top value="0 Ohm"
RN2 "EXB-2HVR000V" RESARRAY_0 77.82,36.468 r90 top value="0 Ohm"
RN3 "EXB-2HV330JV" RESARRAY_0 14.183,35.316 r90 top value="33 Ohms"
RN4 "EXB-2HV330JV" RESARRAY_0 18.556,35.316 r90 top locked value="33 Ohms"
RN5 "EXB-2HV330JV" RESARRAY_0 9.805,35.316 r90 top value="33 Ohms"
RN6 "EXB-2HV330JV" ResArray_0 49.22,66.116 r90 top value="33 Ohms"
RN7 "EXB-2HV330JV" RESARRAY_0 26.618,28.683 r0 top value="33 Ohms"
RN8 "EXB-2HV330JV" RESARRAY_0 26.618,24.234 r0 top value="33 Ohms"
RN9 "EXB-2HV330JV" ResArray_0 44.681,66.116 r90 top value="33 Ohms"
RN10 "EXB-2HV330JV" ResArray_0 40.069,66.116 r90 top value="33 Ohms"
RN11 "EXB-2HV330JV" ResArray_0 53.754,66.116 r90 top value="33 Ohms"
RST "Header 3" HDR1X3 10.677,48.823 r180 top (schematic designator P11)
S1 "SKU : COM-00097SMT- SWCH-08247" TACTILE-PTH 76.436,67.042 r0 top locked
SIWU "Header 3" HDR1X3 10.755,42.625 r180 top (schematic designator P9)
TP1 "testpoint" testpoint#1 75.834,92.149 r90 top
TP2 "testpoint" testpoint#1 20.125,86.998 r90 top
TP3 "testpoint" testpoint#1 75.415,75.823 r90 top
TP4 "testpoint" testpoint#1 11.768,66.131 r90 top
TP5 "testpoint" testpoint#2 28.397,19.895 r90 top
TP6 "testpoint" testpoint#1 55.782,90.864 r90 top (schematic designator tp6)
TP8 "Testpoint" testpoint#3 43.06,35.179 r90 top
TP9 "Testpoint" testpoint#1 44.876,35.165 r90 top
U1 "MCP1700T-1202E/TT" MIC_LDO_1V2 79.006,90.953 r270 top value=1.2V
U2 "MIC5205YM5-TR" MIC5205YM5 11.918,86.32 r0 top
U3 "MCP1700T-3302E/TT" MIC_LDO_3V3 78.572,78.868 r90 top value=3.3V
U4 "LM1117MP-2.5/NOPB" LM1117MP-2.5/NOPB 10.441,74.908 r270 top
U5 "ICE40HX4K-TQ144" LATC-TQFP-144_L 41.853,51.201 r0 top locked
U6 "FT2232HL-Reel" LQFP-64_N 69.066,26.396 r90 top locked
U7 "93LC56BT-E/MS" EEPROM 54.937,29.184 r90 top
U8 "FT601Q-B-T" FT601_NoGND_Pad 16.789,26.111 r0 top locked
U9 "MT25QL128ABA1ESE-0SIT TR" Flash 44.647,16.174 r0 top
U10 "TXS0108EPWR" SOP65P640X120-20N 60.187,44.354 r0 top locked
WR "Header 3" HDR1X3 10.729,45.751 r180 top (schematic designator P10)
X1 "DSC6101JI2A-024.0000" 24MHzOscillator 58.643,51.154 r90 top
X2 "ABM8G-30.000MHZ-18-D2Y-T" 30MHzOscillatorV2 10.739,17.11 r90 top
X3 "ECS-3225S33-120-FN-TR" 12MHzOscillator 62.395,15.748 r0 top value="12 MHz"

## Footprints (in the part's own frame and the unit in brackets; to place one, negate y for a bottom-side part, rotate by r counter-clockwise, add the part's x,y. Pads: shape width x height; smd on the part's side, far side on the other; paste and mask are expansions set on the pad)
12MHzOscillator [mm] "12 MHz Oscillator for FT2232H"
  rect 1x0.8 smd: 1(0,0) 3(2.6,0) 4(2.6,2.1) 6(0,2.1)
  silkscreen extent -0.98,-0.92 3.5,2.84
24MHzOscillator [mm] "24MHz Oscillator"
  rect 0.7x0.8 smd: 1(0,0) 2(1.65,0) 3(1.65,1.25) 4(0,1.25)
  silkscreen extent -0.85,-1.03 2.29,1.93
30MHzOscillatorV2 [mm]
  rect 1.4x1.2 smd: 1(0,0) 2(2.2,0) 3(2.2,1.7) 4(0,1.7)
  silkscreen extent -1.37,-1.15 3.44,2.63
629105136821 [mm] "Micro USB 2.0 SMT Type B Horizontal 5 Contacts"
  rect 0.4x1.35 smd: 1(-1.3,2.675) 2(-0.65,2.675) 3(0,2.675) 4(0.65,2.675) 5(1.3,2.675)
  round 0.7 hole 0.7 unplated: MH1(-2.075,2.45) MH2(2.075,2.45)
  rect 1.8x1.9 smd: Shell(-4,0) Shell(4,0)
  rect 1.9x1.9 smd: Shell(-1.2,0) Shell(1.2,0)
  silkscreen extent -3.7,1.25 3.7,2.85, body extent -4,-2.73 4,3.17, height 2.69
692622030100 [mm] "Micro USB 3.0 Type B Horizontal SMT"
  rect 0.4x1.35 smd: 1(-4.17,2.63) 2(-3.52,2.63) 3(-2.87,2.63) 4(-2.22,2.63) 5(-1.57,2.63) 6(2.53,2.63) 7(3.18,2.63) 8(3.83,2.63) 9(4.48,2.63) 10(5.13,2.63)
  rect 1.8x1.9 smd: Shell(-6.87,-0.045)
  rect 1.9x1.2 smd: Shell(-4.07,-0.045) Shell(-1.67,-0.045) Shell(1.13,-0.045)
  rect 1.9x1.9 smd: Shell(3.63,-0.045)
  rect 2.3x1.9 smd: Shell(6.23,-0.045)
  silkscreen extent -6.75,1.2 6.11,2.79, body extent -6.87,-2.8 6.87,2.81, height 2.77
Cap_0.1uF [mm]
  rect 1.1x0.95 smd: 1(-0.7,0) 2(0.7,0)
  body extent -0.85,-0.45 0.85,0.45, height 0.9
CAP_0.1UF_0402 [mm] "0.1uF capacitor case code 0402"
  rect 0.68x0.68 smd: 1(-0.47,0) 2(0.47,0)
  body extent -0.58,-0.33 0.58,0.32, height 0.65
Cap_0.1uF_0402 [mm] "0.1uF capacitor case code 0402"
  rect 0.68x0.68 smd: 1(-0.47,0) 2(0.47,0)
  body extent -0.58,-0.33 0.58,0.32, height 0.65
Cap_4.7uF [mm]
  rect 1.05x1 smd: 1(-0.75,0) 2(0.75,0)
  body extent -0.88,-0.48 0.87,0.47, height 0.95
CAP_4.7uF_0402 [mm] "4.7uF capacitor with the case code 0402"
  rect 0.56x0.58 smd: 1(-0.48,0) 2(0.48,0)
  body extent -0.53,-0.28 0.53,0.27, height 0.55
Cap_10uF [mm]
  rect 0.75x1 smd: 1(-0.9,0) 2(0.9,0)
  silkscreen extent -0.15,-0.4 0.15,0.4, body extent -0.9,-0.48 0.9,0.47, height 0.95
CAP_18pF_0603 [mm]
  rect 1.05x1 smd: 1(-0.75,0) 2(0.75,0)
  body extent -0.88,-0.48 0.87,0.47, height 1
CAP_470pF [mm]
  rect 0.56x0.58 smd: 1(-0.48,0) 2(0.48,0)
  body extent -0.87,-0.48 0.88,0.48, height 0.87
CAP_6700pF_0402 [mm]
  rect 0.56x0.58 smd: 1(-0.48,0) 2(0.48,0)
  body extent -0.53,-0.28 0.53,0.27, height 0.55
EEPROM [mm] "TSOP, 8-Leads, Body 3.00x3.00mm, Pitch 0.65mm, IPC Medium Density"
  oval 1.4x0.45 smd: 1(-2.2,0.975) 2(-2.2,0.325) 3(-2.2,-0.325) 4(-2.2,-0.975) 5(2.2,-0.975) 6(2.2,-0.325) 7(2.2,0.325) 8(2.2,0.975)
  silkscreen extent -2.32,-1.5 1.1,1.9, body extent -1.5,-1.5 1.5,1.5, height 1.1
ESD_Suppressor [mm] "ESD_Suppressor 0402 resistor like stuff"
  rect 0.56x0.58 smd: 1(-0.48,0) 2(0.48,0)
  body extent -0.52,-0.28 0.52,0.28, height 0.25
FerriteBeads [mm]
  rect 0.7x0.75 smd: 1(0,0) 2(1.45,0)
  silkscreen extent -0.6,-0.67 2.07,0.68
Flash [mm] "SOP, 8-Leads, Body 5.29x5.29mm, Pitch 1.27mm, IPC Medium Density"
  oval 1.65x0.6 smd: 1(-3.575,1.905) 2(-3.575,0.635) 3(-3.575,-0.635) 4(-3.575,-1.905) 5(3.575,-1.905) 6(3.575,-0.635) 7(3.575,0.635) 8(3.575,1.905)
  silkscreen extent -3.7,-2.75 2.35,2.88, body extent -2.75,-2.75 2.75,2.75, height 1.91
FT601_NoGND_Pad [mm]
  oval 0.95x0.2 smd: 1(-4.375,3.6) 2(-4.375,3.2) 3(-4.375,2.8) 4(-4.375,2.4) 5(-4.375,2) 6(-4.375,1.6) 7(-4.375,1.2) 8(-4.375,0.8) 9(-4.375,0.4) 10(-4.375,0) 11(-4.375,-0.4) 12(-4.375,-0.8) 13(-4.375,-1.2) 14(-4.375,-1.6) 15(-4.375,-2) 16(-4.375,-2.4) 17(-4.375,-2.8) 18(-4.375,-3.2) 19(-4.375,-3.6) 39(4.375,-3.6) 40(4.375,-3.2) 41(4.375,-2.8) 42(4.375,-2.4) 43(4.375,-2) 44(4.375,-1.6) 45(4.375,-1.2) 46(4.375,-0.8) 47(4.375,-0.4) 48(4.375,0) 49(4.375,0.4) 50(4.375,0.8) 51(4.375,1.2) 52(4.375,1.6) 53(4.375,2) 54(4.375,2.4) 55(4.375,2.8) 56(4.375,3.2) 57(4.375,3.6)
  oval 0.2x0.95 smd: 20(-3.6,-4.375) 21(-3.2,-4.375) 22(-2.8,-4.375) 23(-2.4,-4.375) 24(-2,-4.375) 25(-1.6,-4.375) 26(-1.2,-4.375) 27(-0.8,-4.375) 28(-0.4,-4.375) 29(0,-4.375) 30(0.4,-4.375) 31(0.8,-4.375) 32(1.2,-4.375) 33(1.6,-4.375) 34(2,-4.375) 35(2.4,-4.375) 36(2.8,-4.375) 37(3.2,-4.375) 38(3.6,-4.375) 58(3.6,4.375) 59(3.2,4.375) 60(2.8,4.375) 61(2.4,4.375) 62(2,4.375) 63(1.6,4.375) 64(1.2,4.375) 65(0.8,4.375) 66(0.4,4.375) 67(0,4.375) 68(-0.4,4.375) 69(-0.8,4.375) 70(-1.2,4.375) 71(-1.6,4.375) 72(-2,4.375) 73(-2.4,4.375) 74(-2.8,4.375) 75(-3.2,4.375) 76(-3.6,4.375)
  silkscreen extent -5.47,-4.7 4.7,4.7, body extent -4.55,-4.55 4.55,4.55, height 1
HDR1X2 [mm] "Connector; Header; 2 Position"
  rect 1.5x1.5 hole 0.9: 1(0,0)
  round 1.5 hole 0.9: 2(2.54,0)
  silkscreen extent -1.27,-1.27 3.81,1.27
HDR1X3 [mm] "Connector; Header; 3 Position"
  rect 1.5x1.5 hole 0.9: 1(0,0)
  round 1.5 hole 0.9: 2(2.54,0) 3(5.08,0)
  silkscreen extent -1.27,-1.27 6.35,1.27
HDR2X2 [mm] "Connector; Header; 2x2 Position"
  rect 1.5x1.5 hole 0.9: 1(0,0)
  round 1.5 hole 0.9: 2(0,2.54) 3(2.54,0) 4(2.54,2.54)
  silkscreen extent -1.27,-1.27 3.81,3.81
HDR2X3 [mm] "Connector; Header; 3x2 Position"
  rect 1.5x1.5 hole 0.9: 1(0,0)
  round 1.5 hole 0.9: 2(0,2.54) 3(2.54,0) 4(2.54,2.54) 5(5.08,0) 6(5.08,2.54)
  silkscreen extent -1.27,-1.27 6.35,3.81
Hirose_connector [mm]
  rect 0.3x0.67 smd: 1(9.9,-1.532) 3(9.3,-1.532) 5(8.7,-1.532) 7(8.1,-1.532) 9(7.5,-1.532) 11(6.9,-1.532) 13(6.3,-1.532) 15(5.7,-1.532) 17(5.1,-1.532) 19(4.5,-1.532) 21(3.9,-1.532) 23(3.3,-1.532) 25(2.7,-1.532) 27(2.1,-1.532) 29(1.5,-1.532) 31(0.9,-1.532) 33(0.3,-1.532) 35(-0.3,-1.532) 37(-0.9,-1.532) 39(-1.5,-1.532) 41(-2.1,-1.532) 43(-2.7,-1.532) 45(-3.3,-1.532) 47(-3.9,-1.532) 49(-4.5,-1.532) 51(-5.1,-1.532) 53(-5.7,-1.532) 55(-6.3,-1.532) 57(-6.9,-1.532) 59(-7.5,-1.532) 61(-8.1,-1.532) 63(-8.7,-1.532) 65(-9.3,-1.532) 67(-9.9,-1.532)
  rect 0.3x0.5 smd: 2(9.6,1.532) 4(9,1.532) 6(8.4,1.532) 8(7.8,1.532) 10(7.2,1.532) 12(6.6,1.532) 14(6,1.532) 16(5.4,1.532) 18(4.8,1.532) 20(4.2,1.532) 22(3.6,1.532) 24(3,1.532) 26(2.4,1.532) 28(1.8,1.532) 30(1.2,1.532) 32(0.6,1.532) 34(0,1.532) 36(-0.6,1.532) 38(-1.2,1.532) 40(-1.8,1.532) 42(-2.4,1.532) 44(-3,1.532) 46(-3.6,1.532) 48(-4.2,1.532) 50(-4.8,1.532) 52(-5.4,1.532) 54(-6,1.532) 56(-6.6,1.532) 58(-7.2,1.532) 60(-7.8,1.532) 62(-8.4,1.532) 64(-9,1.532) 66(-9.6,1.532)
  rect 0.35x1 smd: 68(10.875,-1.368) 69(-10.875,-1.368)
  silkscreen extent -11.15,0 11.15,1.63
LATC-TQFP-144_L [mm] "QFP, 144-Leads, Body 20x20mm, Pitch 0.5mm, IPC High Density"
  oval 1.4x0.25 smd: 1(-10.6,8.75) 2(-10.6,8.25) 3(-10.6,7.75) 4(-10.6,7.25) 5(-10.6,6.75) 6(-10.6,6.25) 7(-10.6,5.75) 8(-10.6,5.25) 9(-10.6,4.75) 10(-10.6,4.25) 11(-10.6,3.75) 12(-10.6,3.25) 13(-10.6,2.75) 14(-10.6,2.25) 15(-10.6,1.75) 16(-10.6,1.25) 17(-10.6,0.75) 18(-10.6,0.25) 19(-10.6,-0.25) 20(-10.6,-0.75) 21(-10.6,-1.25) 22(-10.6,-1.75) 23(-10.6,-2.25) 24(-10.6,-2.75) 25(-10.6,-3.25) 26(-10.6,-3.75) 27(-10.6,-4.25) 28(-10.6,-4.75) 29(-10.6,-5.25) 30(-10.6,-5.75) 31(-10.6,-6.25) 32(-10.6,-6.75) 33(-10.6,-7.25) 34(-10.6,-7.75) 35(-10.6,-8.25) 36(-10.6,-8.75) 73(10.6,-8.75) 74(10.6,-8.25) 75(10.6,-7.75) 76(10.6,-7.25) 77(10.6,-6.75) 78(10.6,-6.25) 79(10.6,-5.75) 80(10.6,-5.25) 81(10.6,-4.75) 82(10.6,-4.25) 83(10.6,-3.75) 84(10.6,-3.25) 85(10.6,-2.75) 86(10.6,-2.25) 87(10.6,-1.75) 88(10.6,-1.25) 89(10.6,-0.75) 90(10.6,-0.25) 91(10.6,0.25) 92(10.6,0.75) 93(10.6,1.25) 94(10.6,1.75) 95(10.6,2.25) 96(10.6,2.75) 97(10.6,3.25) 98(10.6,3.75) 99(10.6,4.25) 100(10.6,4.75) 101(10.6,5.25) 102(10.6,5.75) 103(10.6,6.25) 104(10.6,6.75) 105(10.6,7.25) 106(10.6,7.75) 107(10.6,8.25) 108(10.6,8.75)
  oval 0.25x1.4 smd: 37(-8.75,-10.6) 38(-8.25,-10.6) 39(-7.75,-10.6) 40(-7.25,-10.6) 41(-6.75,-10.6) 42(-6.25,-10.6) 43(-5.75,-10.6) 44(-5.25,-10.6) 45(-4.75,-10.6) 46(-4.25,-10.6) 47(-3.75,-10.6) 48(-3.25,-10.6) 49(-2.75,-10.6) 50(-2.25,-10.6) 51(-1.75,-10.6) 52(-1.25,-10.6) 53(-0.75,-10.6) 54(-0.25,-10.6) 55(0.25,-10.6) 56(0.75,-10.6) 57(1.25,-10.6) 58(1.75,-10.6) 59(2.25,-10.6) 60(2.75,-10.6) 61(3.25,-10.6) 62(3.75,-10.6) 63(4.25,-10.6) 64(4.75,-10.6) 65(5.25,-10.6) 66(5.75,-10.6) 67(6.25,-10.6) 68(6.75,-10.6) 69(7.25,-10.6) 70(7.75,-10.6) 71(8.25,-10.6) 72(8.75,-10.6) 109(8.75,10.6) 110(8.25,10.6) 111(7.75,10.6) 112(7.25,10.6) 113(6.75,10.6) 114(6.25,10.6) 115(5.75,10.6) 116(5.25,10.6) 117(4.75,10.6) 118(4.25,10.6) 119(3.75,10.6) 120(3.25,10.6) 121(2.75,10.6) 122(2.25,10.6) 123(1.75,10.6) 124(1.25,10.6) 125(0.75,10.6) 126(0.25,10.6) 127(-0.25,10.6) 128(-0.75,10.6) 129(-1.25,10.6) 130(-1.75,10.6) 131(-2.25,10.6) 132(-2.75,10.6) 133(-3.25,10.6) 134(-3.75,10.6) 135(-4.25,10.6) 136(-4.75,10.6) 137(-5.25,10.6) 138(-5.75,10.6) 139(-6.25,10.6) 140(-6.75,10.6) 141(-7.25,10.6) 142(-7.75,10.6) 143(-8.25,10.6) 144(-8.75,10.6)
  silkscreen extent -10.72,-9.5 9.5,9.55, body extent -10,-10 10,10, height 1.6
LED_RED [mm] "Cathode in pin 2"
  rect 0.8x0.95 smd: 1(-0.825,0) 2(0.825,0)
  silkscreen extent -0.05,-0.74 1.49,0.37, body extent -0.85,-0.45 0.85,0.45, height 0.8
LM1117MP-2.5/NOPB [mm]
  rect 1.75x0.9 smd: 1(-3.125,2.3) 2(-3.125,0) 3(-3.125,-2.3)
  rect 1.75x3.2 smd: 4(3.125,0)
  silkscreen extent -3.25,-3.35 1.95,3.43, body extent -3.5,-3.35 3.5,3.35, height 1.8
LQFP-64_N [mm] "Thin QFP, 64-Leads, Body 10x10mm, Pitch 0.5mm, IPC Medium Density"
  oval 1.8x0.3 smd: 1(-5.55,3.75) 2(-5.55,3.25) 3(-5.55,2.75) 4(-5.55,2.25) 5(-5.55,1.75) 6(-5.55,1.25) 7(-5.55,0.75) 8(-5.55,0.25) 9(-5.55,-0.25) 10(-5.55,-0.75) 11(-5.55,-1.25) 12(-5.55,-1.75) 13(-5.55,-2.25) 14(-5.55,-2.75) 15(-5.55,-3.25) 16(-5.55,-3.75) 33(5.55,-3.75) 34(5.55,-3.25) 35(5.55,-2.75) 36(5.55,-2.25) 37(5.55,-1.75) 38(5.55,-1.25) 39(5.55,-0.75) 40(5.55,-0.25) 41(5.55,0.25) 42(5.55,0.75) 43(5.55,1.25) 44(5.55,1.75) 45(5.55,2.25) 46(5.55,2.75) 47(5.55,3.25) 48(5.55,3.75)
  oval 0.3x1.8 smd: 17(-3.75,-5.55) 18(-3.25,-5.55) 19(-2.75,-5.55) 20(-2.25,-5.55) 21(-1.75,-5.55) 22(-1.25,-5.55) 23(-0.75,-5.55) 24(-0.25,-5.55) 25(0.25,-5.55) 26(0.75,-5.55) 27(1.25,-5.55) 28(1.75,-5.55) 29(2.25,-5.55) 30(2.75,-5.55) 31(3.25,-5.55) 32(3.75,-5.55) 49(3.75,5.55) 50(3.25,5.55) 51(2.75,5.55) 52(2.25,5.55) 53(1.75,5.55) 54(1.25,5.55) 55(0.75,5.55) 56(0.25,5.55) 57(-0.25,5.55) 58(-0.75,5.55) 59(-1.25,5.55) 60(-1.75,5.55) 61(-2.25,5.55) 62(-2.75,5.55) 63(-3.25,5.55) 64(-3.75,5.55)
  silkscreen extent -5.67,-4.25 4.25,4.57, body extent -5,-5 5,5, height 1.6
MIC5205YM5 [mm] "LDO to generate VCC at 5.25V"
  rect 1x0.6 smd: 1(-1.375,0.95) 2(-1.375,0) 3(-1.375,-0.95) 4(1.375,-0.95) 5(1.375,0.95)
  silkscreen extent -1.5,-1.5 0.5,1.92, body extent -1.6,-1.51 1.6,1.51, height 1.45
MIC_LDO_1V2 [mm] "SOT23, 3-Leads, Body 2.86x2.35mm, Pitch 0.95mm, IPC Medium Density"
  rect 0.95x0.65 smd: 1(-1.175,0.95) 2(-1.175,-0.95) 3(1.175,0)
  silkscreen extent -1.3,-1.55 0.7,1.95, body extent -0.7,-1.52 0.7,1.53, height 1.12
MIC_LDO_3V3 [mm] "SOT23, 3-Leads, Body 2.86x2.35mm, Pitch 0.95mm, IPC Medium Density"
  rect 0.95x0.65 smd: 1(-1.175,0.95) 2(-1.175,-0.95) 3(1.175,0)
  silkscreen extent -1.3,-1.55 0.7,1.95, body extent -0.7,-1.52 0.7,1.53, height 1.12
RES_0 [mm] "Chip Resistor, 2-Leads, Body 1.60x0.80mm, IPC Medium Density"
  rect 0.95x0.9 smd: 1(-0.725,0) 2(0.725,0)
  body extent -0.85,-0.45 0.85,0.45, height 0.55
RES_1.6K [mm] "Chip Resistor, 2-Leads, Body 1.60x0.85mm, IPC Medium Density"
  rect 0.95x0.95 smd: 1(-0.75,0) 2(0.75,0)
  body extent -0.88,-0.48 0.87,0.48, height 0.55
RES_2.2K [mm] "Chip Resistor, 2-Leads, Body 1.60x0.80mm, IPC Medium Density"
  rect 0.8x0.9 smd: 1(-0.8,0) 2(0.8,0)
  silkscreen extent -0.1,-0.35 0.1,0.35, body extent -0.85,-0.45 0.85,0.45, height 0.55
RES_4.7K [mm] "Chip Resistor, 2-Leads, Body 1.60x0.80mm, IPC Medium Density"
  rect 0.85x0.9 smd: 1(-0.775,0) 2(0.775,0)
  body extent -0.85,-0.45 0.85,0.45, height 0.55
RES_10K [mm] "Chip Resistor, 2-Leads, Body 1.60x0.80mm, IPC Medium Density"
  rect 0.85x0.9 smd: 1(-0.775,0) 2(0.775,0)
  body extent -0.85,-0.45 0.85,0.45, height 0.55
RES_12K [mm] "Chip Resistor, 2-Leads, Body 1.60x0.80mm, IPC Medium Density"
  rect 0.85x0.9 smd: 1(-0.775,0) 2(0.775,0)
  body extent -0.85,-0.45 0.85,0.45, height 0.55
Res_33_0402 [mm] "33 Ohm resistor 0402"
  rect 0.55x0.55 smd: 1(-0.45,0) 2(0.45,0)
  body extent -0.53,-0.27 0.53,0.28, height 0.1
RES_100K [mm] "Chip Resistor, 2-Leads, Body 1.60x0.80mm, IPC Medium Density"
  rect 0.85x0.9 smd: 1(-0.775,0) 2(0.775,0)
  body extent -0.85,-0.45 0.85,0.45, height 0.55
RES_680 [mm] "Chip Resistor, 2-Leads, Body 1.60x0.80mm, IPC Medium Density"
  rect 0.85x0.9 smd: 1(-0.775,0) 2(0.775,0)
  body extent -0.85,-0.45 0.85,0.45, height 0.55
RESARRAY_0 [mm] "Chip Array, ConvexE, 16-Leads, Pitch 0.50mm,  Body 3.20x1.50mm,  IPC Medium Density"
  rect 0.5x0.425 smd: 1(-0.787,1.77) 8(-0.787,-1.904) 9(0.713,-1.904) 16(0.713,1.77)
  rect 0.5x0.25 smd: 2(-0.787,1.183) 3(-0.787,0.683) 4(-0.787,0.183) 5(-0.787,-0.317) 6(-0.787,-0.817) 7(-0.787,-1.317) 10(0.713,-1.317) 11(0.713,-0.817) 12(0.713,-0.317) 13(0.713,0.183) 14(0.713,0.683) 15(0.713,1.183)
  silkscreen extent -1.34,1.8 -1.3,1.85
ResArray_0 [mm] "Chip Array, ConvexE, 16-Leads, Pitch 0.50mm,  Body 3.20x1.50mm,  IPC Medium Density"
  rect 0.5x0.425 smd: 1(-0.787,1.77) 8(-0.787,-1.904) 9(0.713,-1.904) 16(0.713,1.77)
  rect 0.5x0.25 smd: 2(-0.787,1.183) 3(-0.787,0.683) 4(-0.787,0.183) 5(-0.787,-0.317) 6(-0.787,-0.817) 7(-0.787,-1.317) 10(0.713,-1.317) 11(0.713,-0.817) 12(0.713,-0.317) 13(0.713,0.183) 14(0.713,0.683) 15(0.713,1.183)
  silkscreen extent -1.34,1.8 -1.3,1.85
RESC1607X60N [mm]
  rect 1.04x1.02 smd: 1(-0.735,0) 2(0.735,0)
SchottkyDiode_CDBU0520 [mm]
  rect 0.85x1.05 smd: 1(-0.85,0) 2(0.85,0)
  silkscreen extent -0.05,-0.79 1.54,0.43, body extent -0.9,-0.5 0.9,0.5, height 0.85
SOP65P640X120-20N [mm]
  rect 1.475x0.45 smd: 1(-2.938,2.925) 2(-2.938,2.275) 3(-2.938,1.625) 4(-2.938,0.975) 5(-2.938,0.325) 6(-2.938,-0.325) 7(-2.938,-0.975) 8(-2.938,-1.625) 9(-2.938,-2.275) 10(-2.938,-2.925) 11(2.938,-2.925) 12(2.938,-2.275) 13(2.938,-1.625) 14(2.938,-0.975) 15(2.938,-0.325) 16(2.938,0.325) 17(2.938,0.975) 18(2.938,1.625) 19(2.938,2.275) 20(2.938,2.925)
  silkscreen extent -3.67,-3.25 1.85,3.5, body extent -3.2,-3.25 3.2,3.25, height 1.2
TACTILE-PTH [mil]
  round 74 / inner round 60 / far side round 74 hole 40: 1(-128,89) 2(128,89) 3(-128,-89) 4(128,-89)
  body extent -156,-118 155,118, height 197
testpoint#1 [mm]
  round 1 smd: 1(0,0)
testpoint#2 [mm]
  round 1 smd: 1(0.166,0)
testpoint#3 [mm]
  round 1 smd: 1(-0.014,0)

## Part data
C1 C4 C9 C11: library part Cap_4.7uF, "Multilayer Ceramic Capacitors MLCC - SMD/SMT 6.3V 4.7uF 0603 X5R 10%", Manufacture No.=C0603C475K9P7411, Package=0603, Component Name=Cap, Created By="Daoming Dong", Datasheet URL.=https://www.mouser.co.uk/datasheet/2/212/KEM_C1006_X5R_SMD-1103249.pdf, Date Created=01-Mar-2019, Mouser No.=80-C0603C475K9P7411
C2 C6 C8 C13: library part Cap_10uF, "Multilayer Ceramic Capacitors MLCC - SMD/SMT 0603 6.3V 10uF X5R 10% Soft Term", Package=0603, Created By="Daoming Dong", Datasheet URL.=https://www.mouser.co.uk/datasheet/2/400/lcc_commercial_soft_en-520032.pdf, Date Created=01-Mar-2019, Manufacture No.=C1608X5R0J106K080AE, Mouser No.=810-C1608X5R0J106KE, Name=Cap
C3 C5 C10 C12 C14 C15 C21 C22 C25 C26 C27 C28 C29 C30 C31 C32 C33 C34 C35 C36 C37 C38 C39 C40 C41 C42 C59 C74: library part Cap_0.1uF, "Multilayer Ceramic Capacitors MLCC - SMD/SMT 0.1uF 10% 50V AEC-Q200", Package=0603, Component Name=Cap, Created By="Daoming Dong", Datasheet URL=https://www.mouser.co.uk/datasheet/2/447/UPY-AC_NP0X7R_16V-to-630V_11-1511105.pdf, Date Created=01-Mar-2019, Manufacture No.=AC0603KRX7R9BB104, Mouser No.=603-AC0603KR9BB104
C7: library part Cap_470pF, "Multilayer Ceramic Capacitors MLCC - SMD/SMT 25V 470pF X7R 0402 10% AEC-Q200", Case Code=0603, Manufacture=KEMET, Component Name=Cap, Created By="Daoming Dong", Datasheet URL.=https://www.mouser.co.uk/datasheet/2/212/KEM_C1014_X7R_FE-CAP_SMD-1102761.pdf, Date Created=13-Mar-2019, Manufacture No.=C0402S471K3RACAUTO, Mouser No.=80-C0402S471K3RAUTO
C16 C19 C23 C24 C44 C45 C46 C48 C49 C50 C51 C52 C53 C54 C55 C56 C62 C63 C64 C65 C66 C67 C68 C70 C72 C75 C76: library part CAP_0.1uF_0402, "Multilayer Ceramic Capacitors MLCC - SMD/SMT 100nF 10V X5R 10%", Case Code=0402, Manufacture=Yageo, Component Name=Cap, Created By="Daoming Dong", Datasheet URL.=https://www.mouser.co.uk/datasheet/2/447/UPY-GPHC_X5R_4V-to-50V_25-1131599.pdf, Date Created=11-Mar-2019, Manufacture No.=CC0402KPX5R6BB104, Mouser No.=603-CC402KPX5R6BB104
C17 C43 C58 C60 C61 C71: library part Cap_4.7uF_0402, "Multilayer Ceramic Capacitors MLCC - SMD/SMT 0402 6.3V 4.7uF X5R 10% T: 0.5mm", Case Code=0402, Manufactue=TDK, Component Name=Cap, Created By="Daoming Dong", Datasheet URL.=https://www.mouser.co.uk/datasheet/2/400/lcc_commercial_general_en-837201.pdf, Date Created=13-Mar-2019, Manufacture No.=C1005X5R0J475K050BC, Mouser No.=810-C1005X5R0J475K
C18 C20: library part Cap_18pF_0603, "Multilayer Ceramic Capacitors MLCC - SMD/SMT 50V 18pF 0603 X7R 10% AEC-Q200", Case Code=0603, Manufacture=KEMET, Component Name=Cap, Datasheet URL.=https://www.mouser.co.uk/datasheet/2/212/KEM_C1023_X7R_AUTO_SMD-1093309.pdf, Manufacture No.=C0603C180K5RACAUTO, Mouser No.=80-C0603C180K5RAUTO
C47 C57 C69: library part Cap_6800pF_0402, "Multilayer Ceramic Capacitors MLCC - SMD/SMT 50V 6800pF X7R 0402 10% AEC-Q200", Case Code=0402, Manufacture=KEMET, Component Name=Cap, Created By="Daoming Dong", Datasheet URL.=https://www.mouser.co.uk/datasheet/2/212/KEM_C1090_X7R_ESD-1103328.pdf, Date Created=18-Mar-2019, Manufacture No.=C0402C682K5RECAUTO, Mouser No.=80-C0402C682K5RECAUT
D1 D2: library part ESD_Suppresor, "ESD Suppressors / TVS Diodes PULSEGUARD 0402 ESD SUPPRESSOR", Case Code=0402, Manufacature=Littelfuse, Component Name="ESD Suppressor", Created By="Daoming Dong", Datasheet URL.=https://www.mouser.co.uk/datasheet/2/240/Littelfuse_PulseGuard_PGB1_Datasheet.pdf-461684.pdf, Date Created=12-Mar-2019, Manufacture No.=PGB1010402KR, Mouser No.=576-PGB1010402KR
D3: library part SDiode_CDBU0520, "Schottky Diodes & Rectifiers VR=20V, IO=500mA", Case Code=0603, Manufacture="Comchip Technology", Created By="Daoming Dong", Datasheet URL.=https://www.mouser.co.uk/datasheet/2/80/CDBU0520-HF-RevA797161-1481024.pdf, Date Created=03-May-2019, Manufacture No.=CDBU0520, Mouser No.=750-CDBU0520
DB7 DB8 GP0 GP1 RST SIWU WR: "Header, 3-Pin", LatestRevisionDate=17-Jul-2002, LatestRevisionNote="Re-released for DXP Platform.", Publisher="Altium Limited"
J1: "Micro USB 2.0 Type B Receptacle WR-COM, Horizontal, SMT, with Pads and Pegs", Contact Resistance="30 mOhm", Operating Temperature="-40 to 105 degC", Rated Current="1 A", Working Voltage="30 VAC", ComponentLink1Description=Manufacturer, ComponentLink1URL=http://www.we-online.de, ComponentLink2Description=Datasheet, ComponentLink2URL=https://katalog.we-online.de/em/datasheet/629105136821.pdf, Connector Type="Micro USB 2.0 Type B", Gender=Receptacle, Mounting Technology=SMT, Orientation=Horizontal, Packaging="Tape and Reel", Part Number=629105136821, Published Date="September 2018", Publisher="Wurth Elektronik"
J2: "Micro USB 3.0 Type B Receptacle WR-COM, Horizontal, SMT, with Pads", Contact Resistance="50 mOhm", Operating Temperature="-20 to 85 degC", Rated Current="0.25 A", Working Voltage="30 VAC", ComponentLink1Description=Manufacturer, ComponentLink1URL=http://www.we-online.de, ComponentLink2Description=Datasheet, ComponentLink2URL=https://katalog.we-online.de/em/datasheet/692622030100.pdf, Connector Type="Micro USB 3.0 Type B", Gender=Receptacle, Mounting Technology=SMT, Orientation=Horizontal, Packaging="Tape and Reel", Part Number=692622030100, Published Date="September 2018", Publisher="Wurth Elektronik"
J3: "FFC & FPC Connectors FPC ZIF CONN 67 POS SMT HORZ MNT", Manufacture="Hirose Connector", Component Name="Hirose Connector FH39A-67S-0.3SHW(10)", Created By="Daoming Dong", Datasheet URL.=https://www.mouser.co.uk/datasheet/2/185/_catalog-939287.pdf, Date Created=05-Mar-2019, Manufacture No.=FH39A-67S-0.3SHW(10), Mouser No.=798-FH39A-67S-0.3SHW(10)
L1 L2: library part "Ferrite Bead", "Ferrite Bead, 0603 [1608 Metric], 600 ohm, 500 mA, WE-CBF HF Series, 0.35 ohm, ± 25%", Case Code=0603, Manufacture="Wurth Electronics", Component Name="Ferrite Bead", Created By="Youchao Wang", Datasheet URL=https://www.mouser.co.uk/datasheet/2/445/742863160-538931.pdf, Date Created=22-Mar-2019, Manufacture No.=742863160, Mouser No.=710-742863160
L3: library part FerriteBeadForFT601, "Ferrite Beads 0603 30ohms 1000mA Auto Infotainment", Case Code=0603, Manufacture=muRata, Component Name="Ferrite Beads", Created By="Daoming Dong", Data Created=25th-Mar-2019, Datasheet URL.=https://www.mouser.co.uk/datasheet/2/281/c51e-794816.pdf, Manufacture No.=BLM18PG300SZ1D, Mouser No.=81-BLM18PG300SZ1D
LED1 LED2 LED3 LED4 LED5 LED6 LED7: library part LED_RED, "Standard LEDs - SMD RED", Case Code=0603, Component Name=LED_R, Created By="Daoming Dong", Datasheet URL.=https://www.mouser.co.uk/datasheet/2/427/tlmb1100-279843.pdf, Date Created=11-Mar-2018, Manufacture No.=TLMS1000-GS08, Mouser No.=78-TLMS1000, Vf=1.8V
P1 P3 P5: "Header, 2-Pin", LatestRevisionDate=17-Jul-2002, LatestRevisionNote="Re-released for DXP Platform.", Publisher="Altium Limited"
P2 P7: "Header, 4-Pin", LatestRevisionDate=17-Jul-2002, LatestRevisionNote="Re-released for DXP Platform.", Publisher="Altium Limited"
P6-GND: "Header, 3-Pin, Dual row", LatestRevisionDate=17-Jul-2002, LatestRevisionNote="Re-released for DXP Platform.", Publisher="Altium Limited"
R1 R3 R21 R22 R23 R26 R36 R48: library part Res_680, "Thin Film Resistors - SMD 680 ohm 1% 50 ppm Thin Film", Case Code=0603, Manufacture=Yageo, Component Name=Res, Created By="Daoming Dong", Datasheet URL.=https://www.mouser.co.uk/datasheet/2/447/PYu-RT_1-to-0.01_RoHS_L_9-1222720.pdf, Date Created=02-Mar-2019, Manufacture No.=RT0603FRE13680RL, Mouser No.=603-RT0603FRE13680RL
R2 R6 R11: library part Res_2.2K, "Thick Film Resistors - SMD 1/10Watt 2.2Kohms 5% Commercial Use", Case Code=0603, Manufacture=Vishay, Component Name=Res, Created By="Daoming Dong", Datasheet URL.=https://www.mouser.co.uk/datasheet/2/427/crcwce3-1223726.pdf, Date Created=02-Mar-2019, Manufacture No.=CRCW06032K20JNEAC, Mouser No.=71-CRCW06032K20JNEAC
R4: library part Res_33_0402, "Thick Film Resistors - SMD 0402 Resistor 0.5% 100ppm 33Ohm", Case Code=0402, Manufacture=Panasonic, Component Name=Res, Created By.="Daoming Dong", Datasheet URL.=https://www.mouser.co.uk/datasheet/2/315/AOA0000C304-1149620.pdf, Date Created=12-Mar-2019, Manufcature No.=ERJ2RKD33R0X, Mouser No.=667-ERJ-2RKD33R0X
R5 R7 R8 R9 R14 R15 R17 R18 R25 R27 R39: library part Res_10K, "Thin Film Resistors - SMD 10K ohm 0.05% 50 ppm High-Precision", Case Code=0603, Manufacture=Yageo, Component Name=Res, Created By="Daoming Dong", Datasheet URL.=https://www.mouser.co.uk/datasheet/2/447/PYu-RT_1-to-0.01_RoHS_L_9-1222720.pdf, Date Created=02-Mar-2019, Manufacture No.=RT0603WRE0710KL, Mouser No.=603-RT0603WRE0710KL
R10: library part Res_1.6K, "Thick Film Resistors - SMD 0603 Resistor 0.5% 50ppm 1.6KOhm", Case Code=0603, Manufacture=Panasonic, Component Name=Res, Created By="Daoming Dong", Datasheet URL.=https://www.mouser.co.uk/datasheet/2/315/AOA0000C304-1149620.pdf, Date Created=02-Mar-2019, Manufacture No.=ERJ-3RBD1601V, Mouser No.=667-ERJ-3RBD1601V
R12: library part Res_12K, "Thick Film Resistors - SMD 12K ohm 1% 1/10W AEC-Q200", Case Code=0603, Manufacture=Yageo, Component Name=Res, Created By="Daoming Dong", Datasheet URL.=https://www.mouser.co.uk/datasheet/2/447/PYu-AC_51_RoHS_L_6-1152827.pdf, Date Created=02-Mar-2019, Manufacture No.=AC0603FR-1012KL, Mouser No.=603-AC0603FR-1012KL
R13 R16 R24 R30 R31 R32 R33 R34 R35 R37 R38 R40 R41 R42 R43 R44 R45 R46 R47: library part Res_0, "Thick Film Resistors - SMD 1/10Watt 0ohms Commercial Use", Case Code=0603, Manufacture=Vishay, Component Name=Res, Created By="Daoming Dong", Datasheet URL.=https://www.mouser.co.uk/datasheet/2/427/crcwce3-1223726.pdf, Date Created=02-Mar-2019, Manufacture No.=CRCW06030000Z0EAC, Mouser No.=71-CRCW06030000Z0EAC
R19: library part Res_4.7K, "Thick Film Resistors - SMD 4.7K ohm 5% 1/10W AEC-Q200", Case Code=0603, Manufacture=Yageo, Component Name=Res, Created By="Daoming Dong", Datasheet URL.=https://www.mouser.co.uk/datasheet/2/447/PYu-AC_51_RoHS_L_6-1152827.pdf, Date Created=02-Mar-2019, Manufacture No.=AC0603JR-134K7L, Mouser No.=603-AC0603JR-134K7L
R20 R49 R52: library part Res_100K, "Thick Film Resistors - SMD 100K ohm 10% 75V AEC-Q200", Case Code=0603, Manufacture=Yageo, Component Name=Res, Created By="Daoming Dong", Datasheet URL.=https://www.mouser.co.uk/datasheet/2/447/PYu-SR_20105_RoHS_L_7-1488668.pdf, Date Created=02-Mar-2019, Manufacture No.=SR0603KR-07100KL, Mouser No.=603-SR0603KR-07100KL
RN1 RN2: library part ResArray_0, "Resistor Networks & Arrays 0402 Zero ohm Jumper Convex Term AEC-Q200", Case Code=0402, Manufacture=Panasonic, Created By="Daoming Dong", Datasheet URL.=https://www.mouser.co.uk/datasheet/2/315/AOC0000C14-1108062.pdf, Date Created=11-Mar-2019, Manufacture No.=EXB-2HVR000V, Mouser No.=667-EXB-2HVR000V
RN3 RN4 RN5 RN6 RN7 RN8 RN9 RN10 RN11: library part ResArray, "Resistor Networks & Arrays 33 OHM 5%", Component Name="Resistor Array", Datasheet URL.=https://www.mouser.co.uk/datasheet/2/315/AOC0000C14-1108062.pdf, Date Created=11-Mar-2019, Manufacture No.=EXB-2HV330JV, Mouser No.=667-EXB-2HV330JV
S1: library part TAC_SWITCHPTH, Package=TACTILE-PTH, DeviceName=PTH, DeviceSetName=TAC_SWITCH, GateName_1=S, LibraryName=SparkFun-Electromechanical, SymbolName_1=SWITCH-MOMENTARY
TP1 TP2 TP3 TP4 TP5 TP6: library part Testpoint, "Testpoint for testing voltage", Created By="Daoming Dong", Date Created=11-Mar-2019
TP8 TP9: "Testpoint for testing voltage", Created By="Daoming Dong", Date Created=11-Mar-2019
U1: library part MIC_LDO_1V2, "LDO Voltage Regulators 250mA Adj LDO 2%", Manufacture=Microchip, Component Name="LDO 1.2V", Created By="Daoming Dong", Datasheet URL.=https://www.mouser.co.uk/datasheet/2/268/MCP1700-Low-Quiescent-Current-LDO-20001826E-737536.pdf, Date Created=13-Mar-2019, Manufacture No.=MCP1700T-1202E/TT, Mouser No.=579-MCP1700T1202E/TT
U2: library part MIC5205YM5, "LDO Voltage Regulators 150mA 1% Low Noise LDO", Manufacture="Microchip Technology", Created By="Daoming Dong", Datasheet URL.=https://www.mouser.co.uk/datasheet/2/268/mic5205-778789.pdf, Date Created=11-Mar-2019, Manufacture No.=MIC5205YM5-TR, Mouser No.=998-MIC5205YM5TR
U3: library part MIC_LDO_3V3, "3.3v LDO Voltage Regulators 250mA Adj LDO 2%", Manufacture=Microchip, Component Name=LDO, Created By="Daoming Dong", Datasheet URL.=https://www.mouser.co.uk/datasheet/2/268/MCP1700-Low-Quiescent-Current-LDO-20001826E-737536.pdf, Date Created=14-Mar-2019, Manufacture No.=MCP1700T-3302E/TT, Mouser No.=579-MCP1700T3302E/TT
U4: library part LDO_2V5, "LDO Voltage Regulators 800mA LDO Linear Reg", Manufacture="Texas Instruments", Created By="Daoming Dong", Datasheet URL.=http://www.ti.com/general/docs/suppproductinfo.tsp?distId=26&gotoUrl=http%3A%2F%2Fwww.ti.com%2Flit%2Fds%2Fsymlink%2Flm1117.pdf, Date Created=05-Mar-2019, Manufacture No.=LM1117MP-2.5/NOPB, Mouser No.=926-LM1117MP-2.5/NOPB
U5: "iCE40 HX4K Series FPGA Family, 3520 Logic Cells, 1.2 V Core, 80 K Embedded RAM Bits, 144-pin TQFP, Pb-Free, Tray", Manufacturer="Lattice Semiconductor", Supplier Part Number 1=220-1572-ND, Supply Voltage=1.2V, ComponentLink1Description="Manufacturer URL", ComponentLink1URL=http://www.latticesemi.com/en, ComponentLink2Description=Datasheet, ComponentLink2URL=http://www.latticesemi.com/~/media/Documents/DataSheets/iCE/iCE40LPHXFamilyDataSheet.pdf, ComponentLink3Description="Package Specification", ComponentLink3URL=http://www.latticesemi.com/lit/docs/package/pkg.pdf, DatasheetVersion="Rev. 02.9", Embedded RAM Bits=80K, Logic Cells=3520, Mounting Technology="Surface Mount", PackageDescription="144-Pin Thin Quad Flat Package, Body 20 x 20 mm, Pitch 0.5 mm", PackageReference=TQFP-144, PackageVersion="Rev. 03.9, 02/2013", Packing=Tray, PartNumber=ICE40HX4K-TQ144, Phase-Locked Loops=2, RoHS=TRUE, Supplier 1=Digi-Key, Supplier 2=Mouser, Supplier Part Number 2=842-ICE40HX4K-TQ144
U6: "Dual High Speed USB To Multipurpose UART/FIFO IC, 64-pin LQFP, Tape and Reel", Manufacturer=FTDI, ComponentLink1Description="Manufacturer URL", ComponentLink1URL=http://www.ftdichip.com/, ComponentLink2Description=Datasheet, ComponentLink2URL=http://www.ftdichip.com/Support/Documents/DataSheets/ICs/DS_FT2232H.pdf, DatasheetVersion="ver 2.21, Jun-2012", PackageDescription="64-Pin Thin Quad Flat Pack, 10 x 10 x 1.4 mm Body, 0.5 mm Pitch", PackageReference=LQFP-64, PackageVersion=Jun-12, PartNumber=FT2232HL-Reel
U7: library part EEPROM, "EEPROM 128x16 for FT2232", Manufacture=Microchip, Package=MSOP-8, Created By="Daoming Dong", Date Crated=11-Mar-2019, Manufactur No.=93LC56BT-E/MS, Mouser No.=579-93LC56BT-E/MS, Organisation=128x16
U8: "USB Interface IC USB 3.0 Super-Speed 32Bits Sync FIFO", Created By="Daoming Dong", Datasheet URL=http://www.farnell.com/datasheets/2263949.pdf, Date Created="25th Feb 2019", Farnell Order Code=2748207, Manufacture Part No.=FT601Q-B-T, RS Stock No.=146-6840